# Altium PCB Hub.PcbDoc
Units mil, origin at the board's own origin, x right, y up, seen from the top; angles counter-clockwise.
Board outline 2440.94 x 2440.94 mil, 4 copper layers (Top Layer, Layer 2, Layer 3, Bottom Layer), stack 63.977 mil thick; 78 components, 68 nets, 305 pads, 111 vias.
Unrouted connection lines stored in the file: 111.
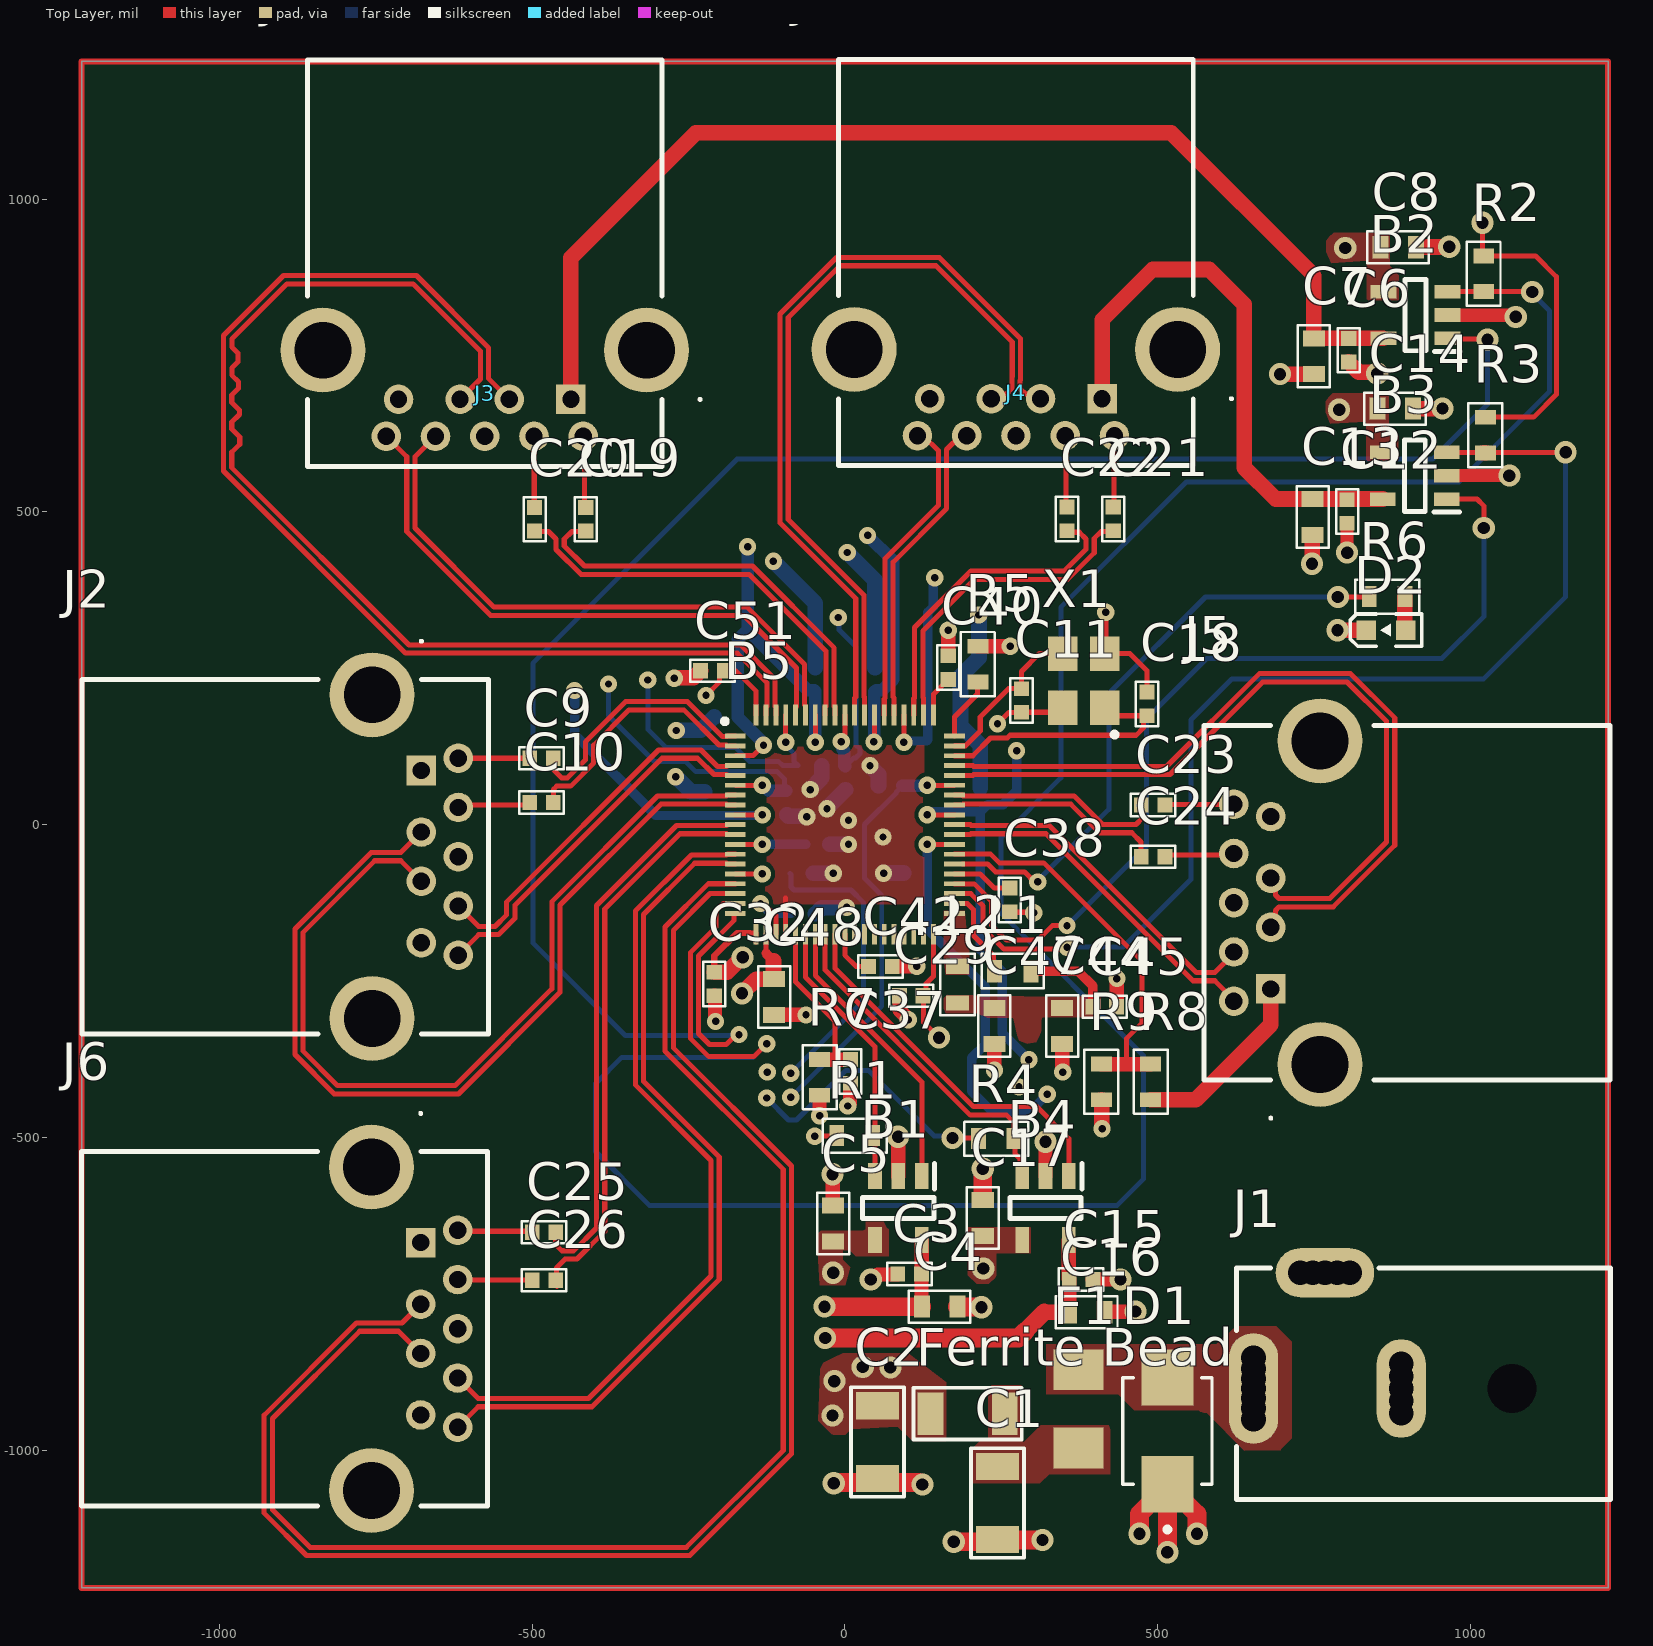
[diagram p0: Top Layer view]
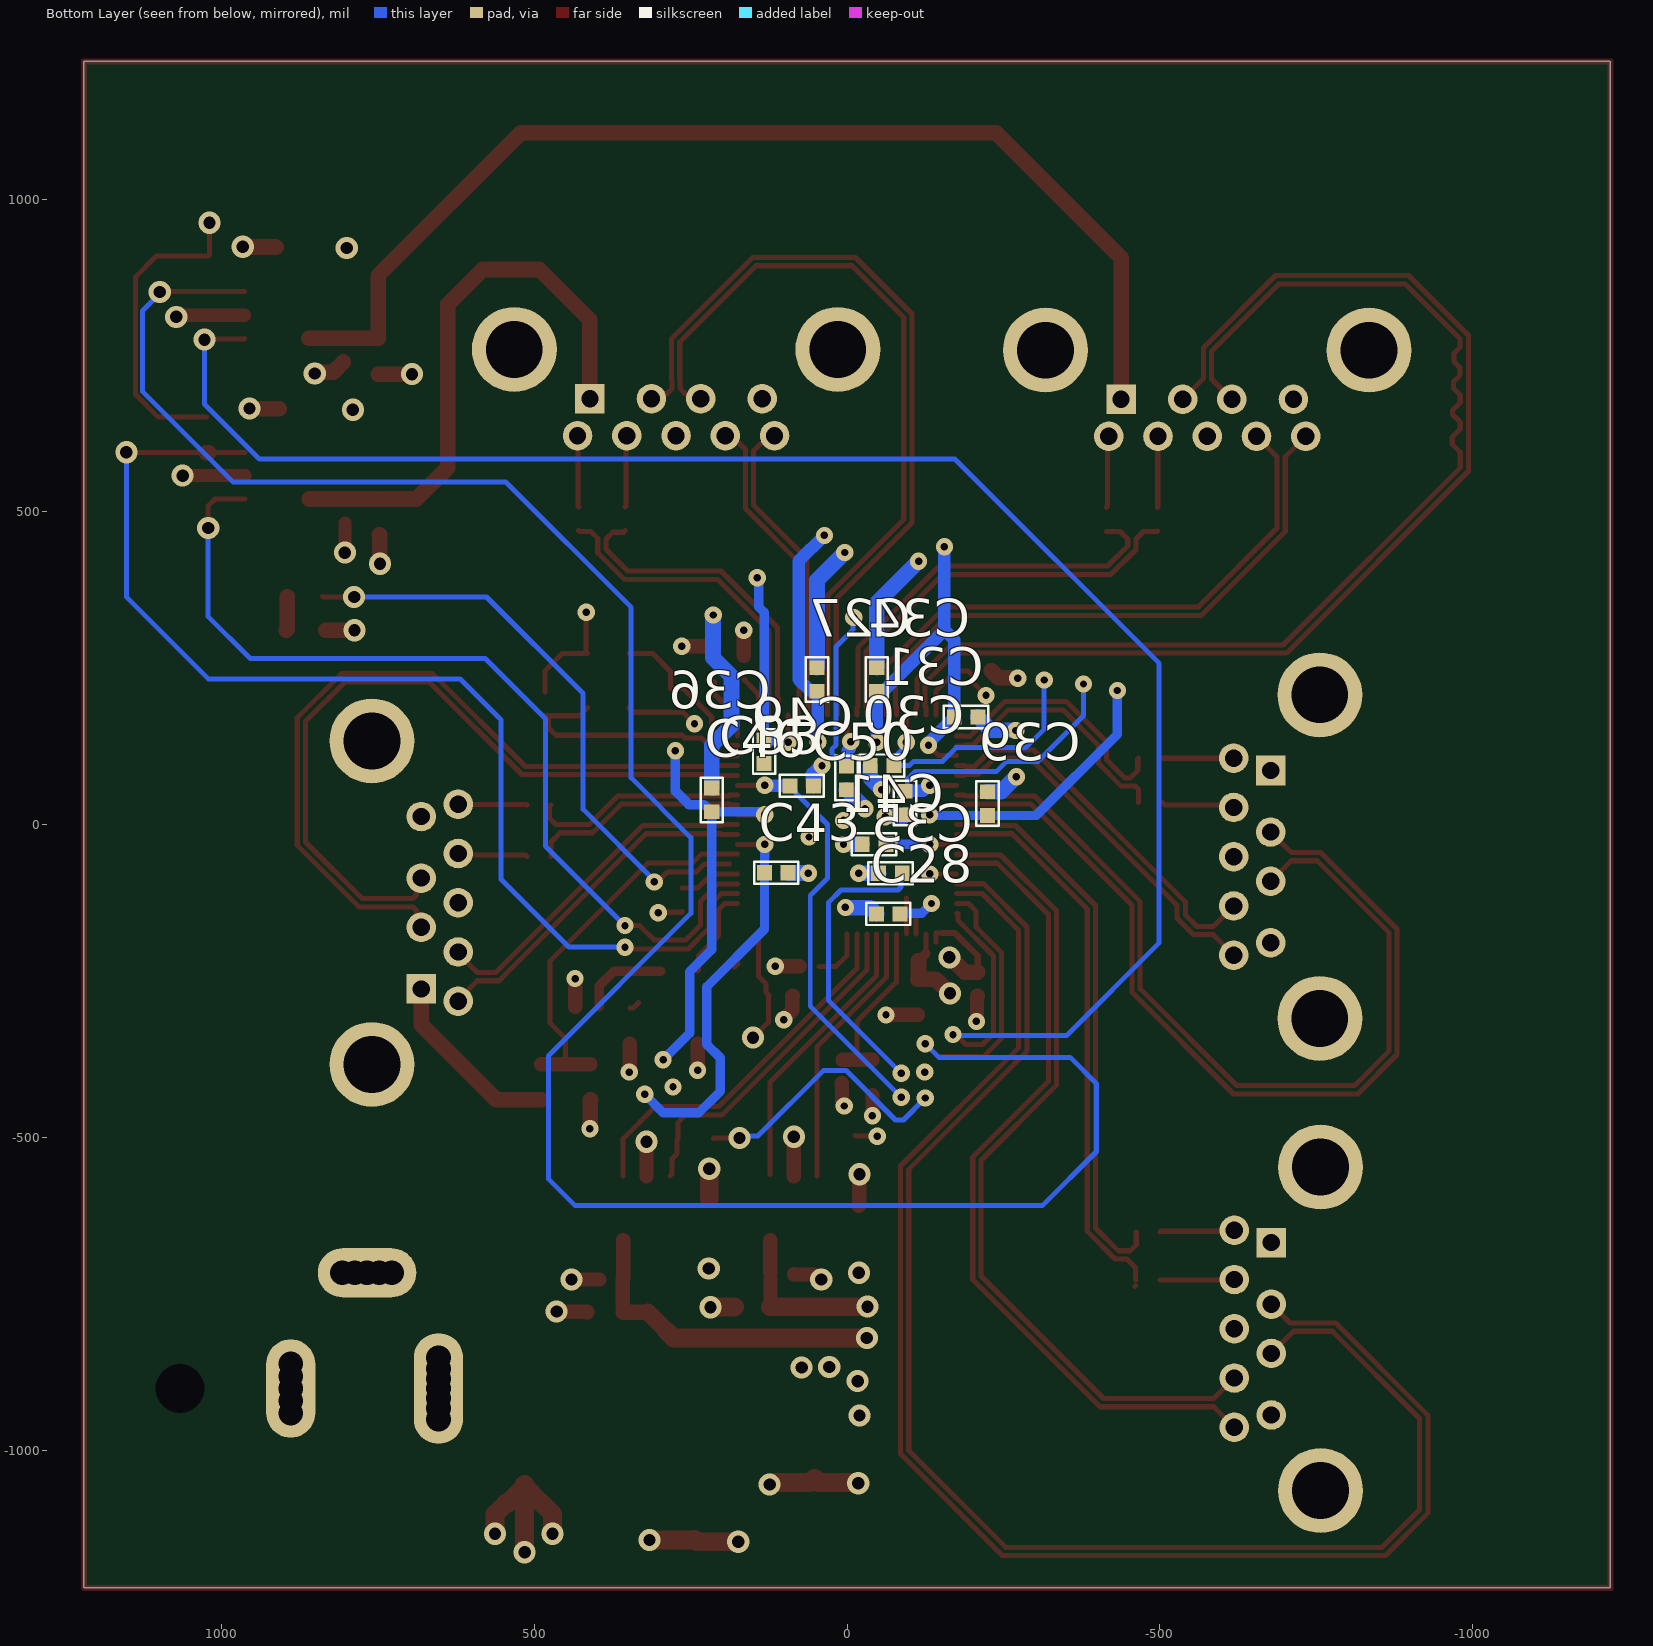
[diagram p1: Bottom Layer view, seen from below]
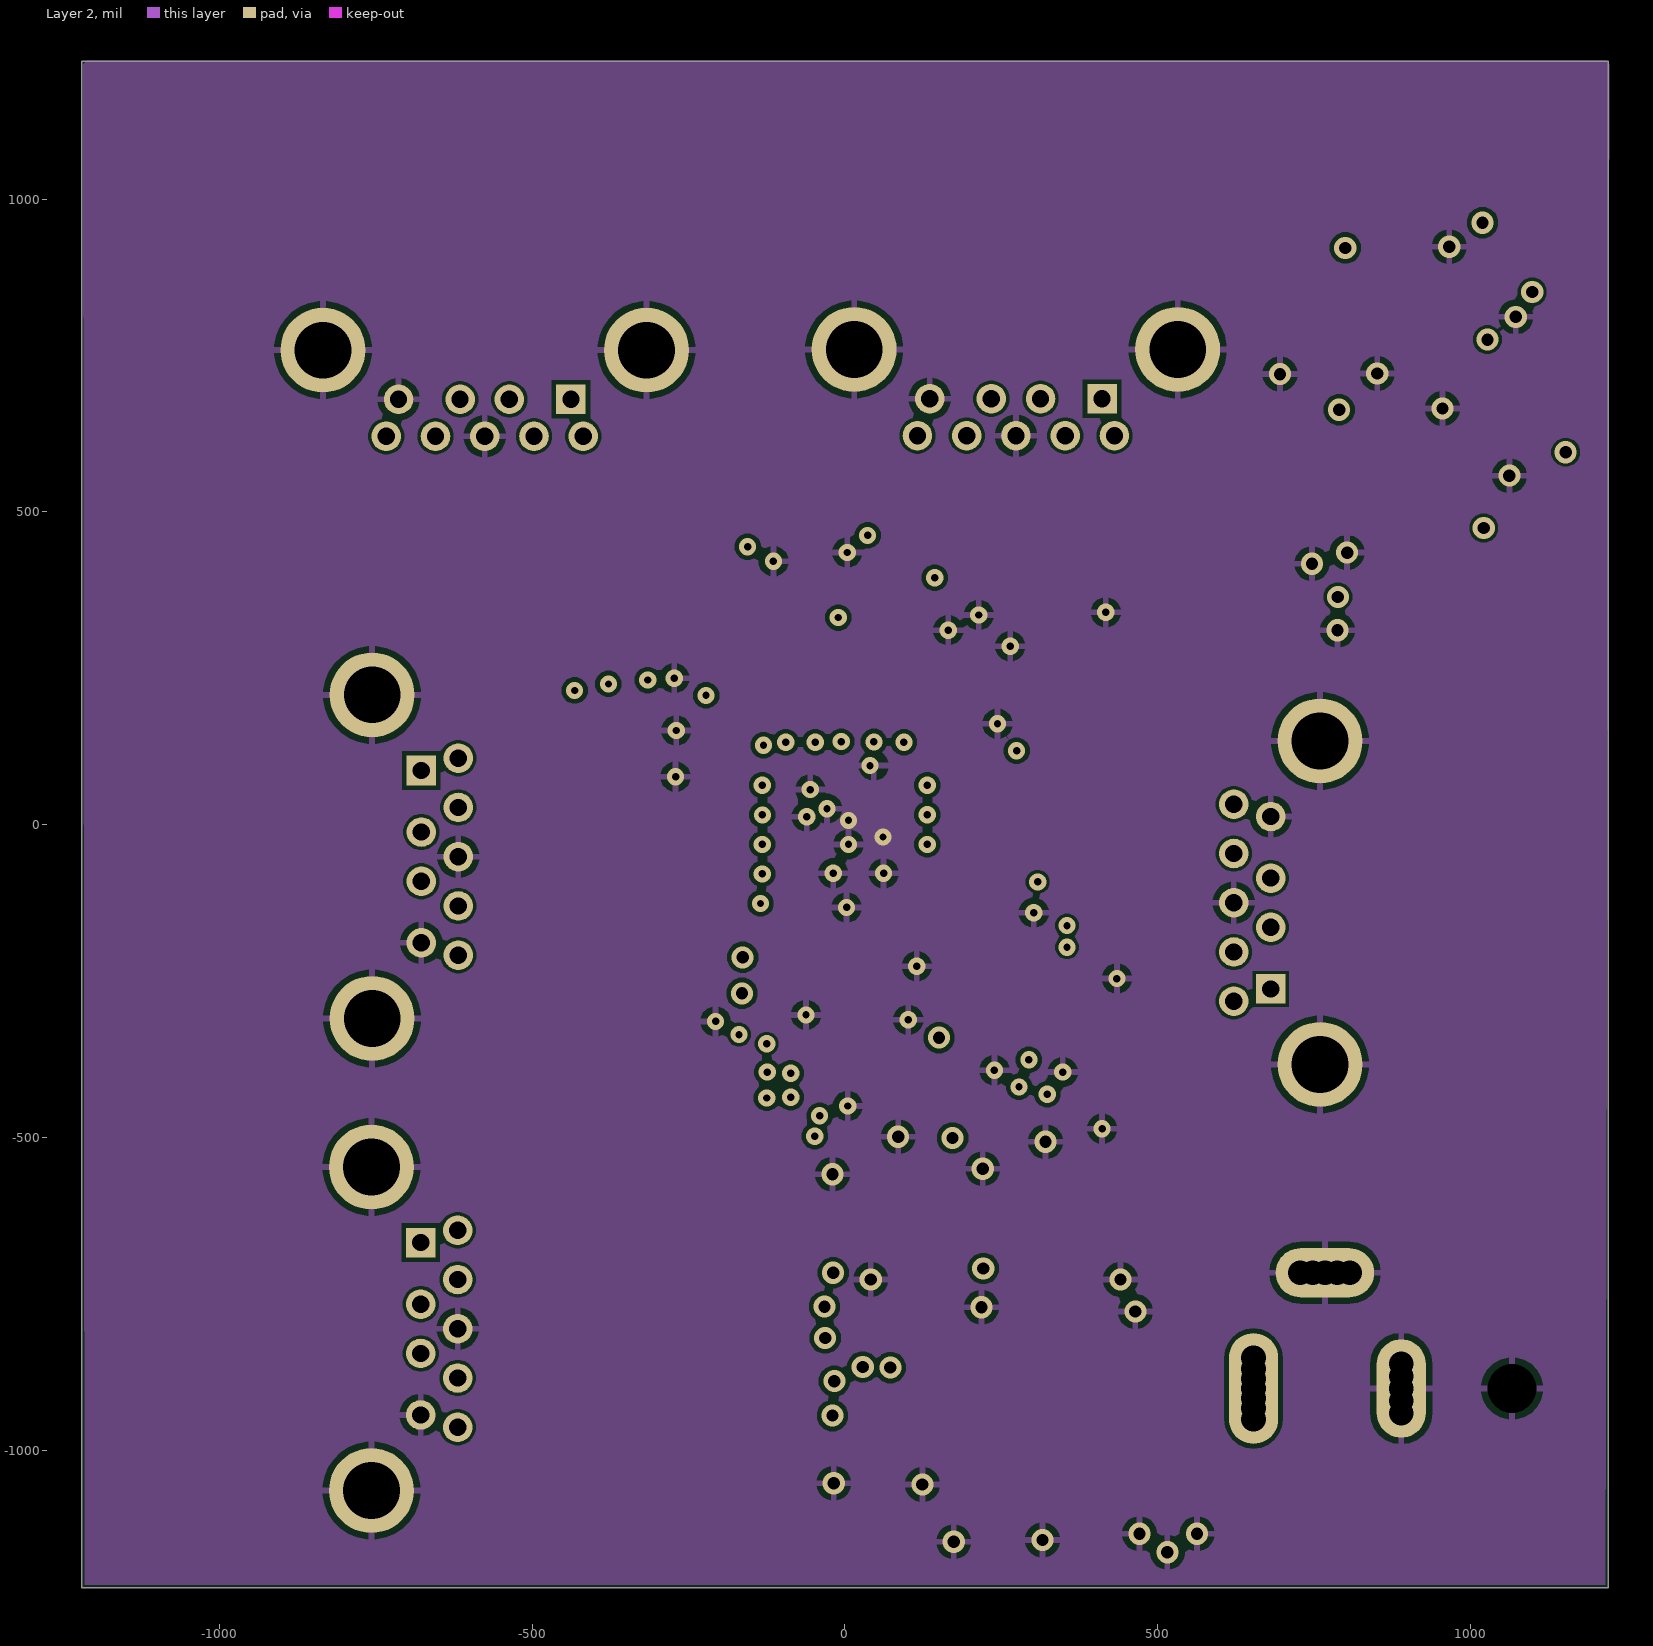
[diagram p2: Layer 2]
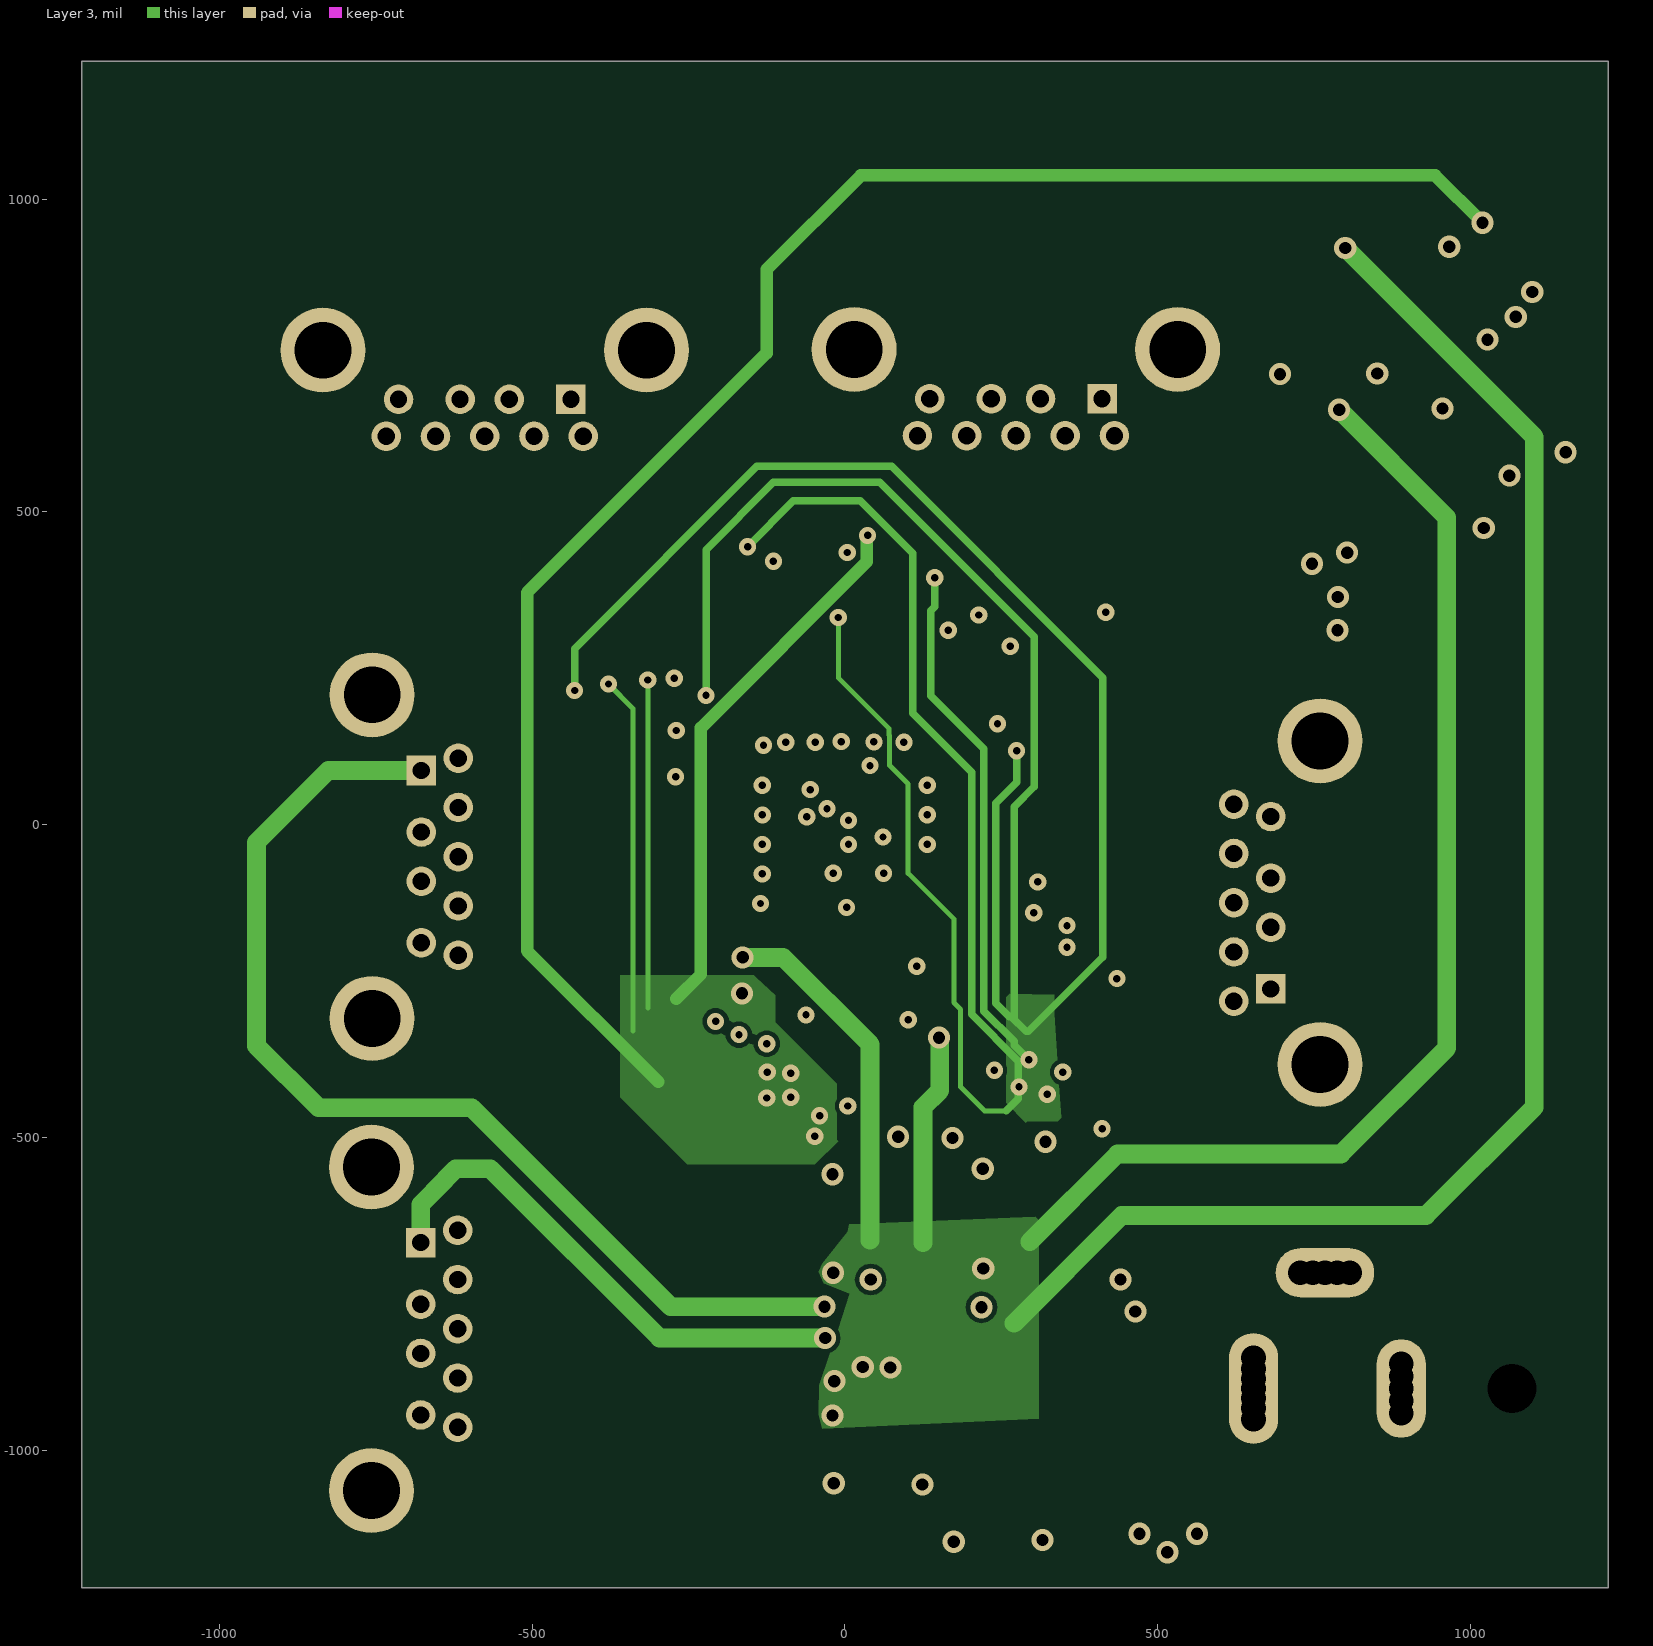
[diagram p3: Layer 3]
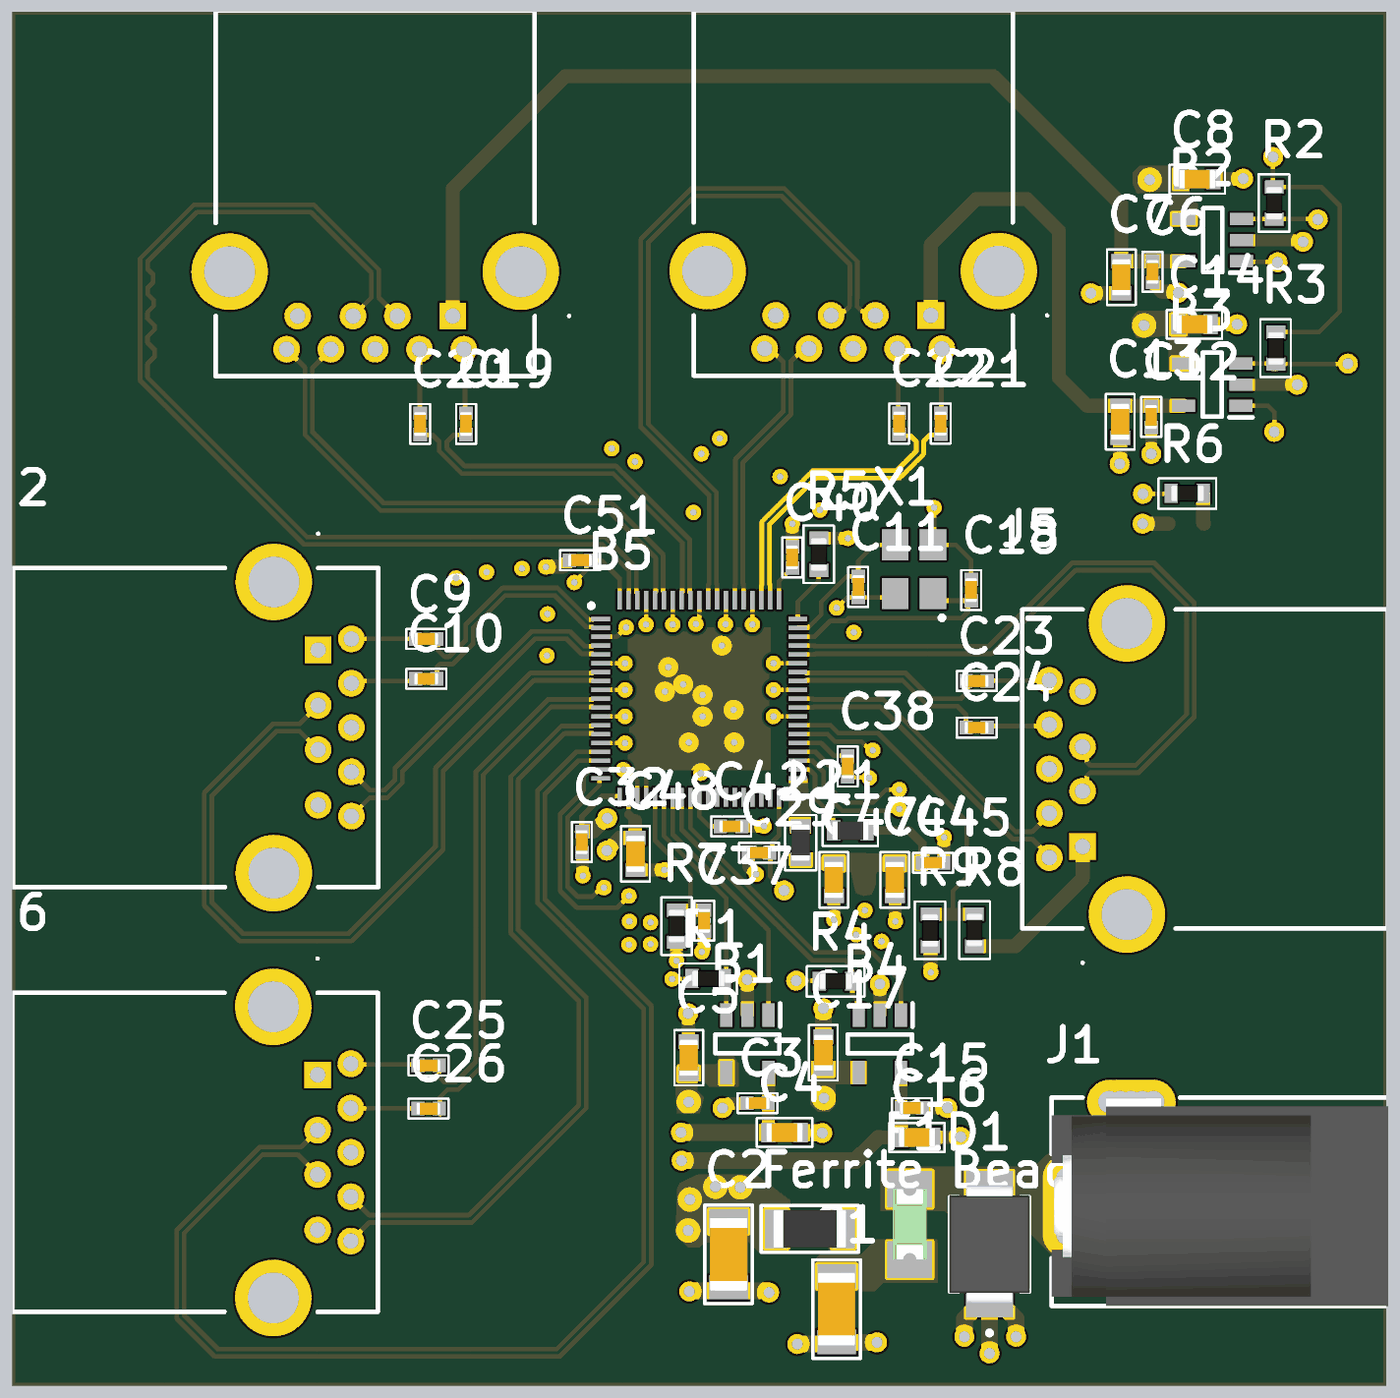
[diagram p4: 3D render of the assembled board from above, using the file's embedded part models]
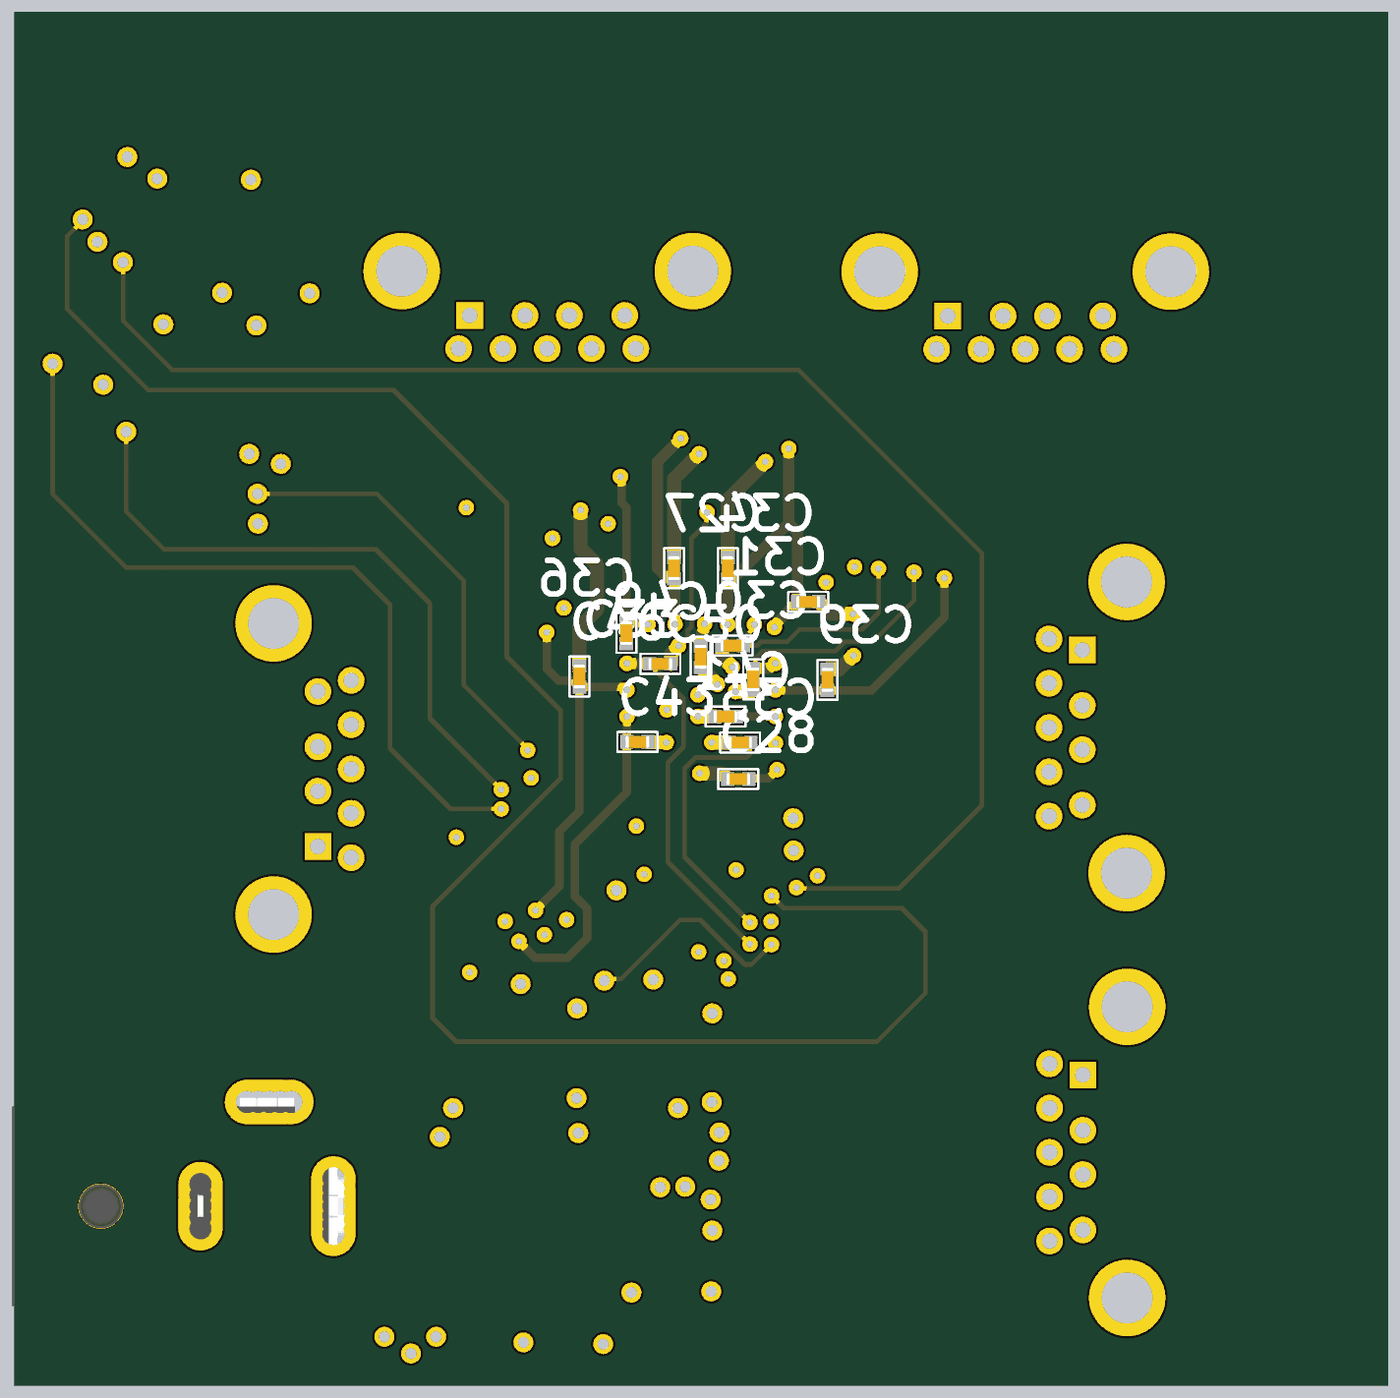
[diagram p5: 3D render of the assembled board from below, using the file's embedded part models]

## Layer stack, top to bottom
Top Solder: solder mask 1, SM-001, Dk 4
Top Layer: signal copper 1.378
Dielectric 1: prepreg 8.268, PP-017, Dk 4.3
Layer 2: signal copper 0.689
Dielectric 2: core 43.307, Core-039, Dk 4.8
Layer 3: signal copper 0.689
Dielectric 3: prepreg 8.268, PP-017, Dk 4.3
Bottom Layer: signal copper 1.378
Bottom Solder: solder mask 1, SM-001, Dk 4

## Board outline
-1220.47,-1220.47 -1220.47,1220.47 1220.47,1220.47 1220.47,-1220.47

## Design rules (kind name [scope] priority, off if disabled: settings)
Clearance Power [InNetClass('Power Class')] p1: gap=7 ignorepadtopadclearanceinfootprint=FALSE
Clearance [All] p2: gap=5 ignorepadtopadclearanceinfootprint=FALSE
DiffPairsRouting [All] p1: maxlimit=5 minlimit=5 mostfreqgap=5 toplayer_minwidth=8.17 toplayer_maxwidth=8.17 toplayer_prefwidth=8.17 midlayer1_minwidth=5.78 midlayer1_maxwidth=5.78 midlayer1_prefwidth=5.78 midlayer2_minwidth=5.78 midlayer2_maxwidth=5.78 midlayer2_prefwidth=5.78 bottomlayer_minwidth=8.17 bottomlayer_maxwidth=8.17 bottomlayer_prefwidth=8.17 impedanceprofiledriven=TRUE impedanceprofileid={EBA9EF47-03B7-44E5-A8EC-CA89CEC4901F} impedanceprofilevalue=90.000000 maxuncoupledlength=500
MatchedLengths [InDifferentialPairClass('All Differential Pairs')] p1: tolerance=2 checknetsindiffpair=FALSE checkdiffpairvsdiffpair=TRUE checkxsignals=TRUE checkothers=TRUE
PolygonConnect "GND Under IC" [All vs IsNamedPolygon('GND_L01_P000')] p1: thpad.connectstyle=Direct thpad.reliefconductorwidth=10 thpad.reliefentries=4 thpad.polygonreliefangle="90 Angle" thpad.airgapwidth=10 smdpad.connectstyle=Relief smdpad.reliefconductorwidth=10 smdpad.reliefentries=4 smdpad.polygonreliefangle="90 Angle" smdpad.airgapwidth=10 via.connectstyle=Direct via.reliefconductorwidth=10 via.reliefentries=4 via.polygonreliefangle="90 Angle" via.airgapwidth=10
PolygonConnect "Power Class" [InNetClass('Power Class')] p2: connectstyle=Direct reliefconductorwidth=10 reliefentries=4 polygonreliefangle="90 Angle" airgapwidth=10
PolygonConnect [All] p3: connectstyle=Relief reliefconductorwidth=10 reliefentries=4 polygonreliefangle="90 Angle" airgapwidth=10
RoutingVias [All] p1: holewidth=28 width=50 viastyle="Through Hole" minholewidth=7.87 minwidth=17.72 maxholewidth=28 maxwidth=50
SolderMaskExpansion [All] p1: expansion=4 istentingtop=FALSE
SupplyNets "Schematic Supply Nets_1" [InNet('+5 NF')] p1: voltage=0.000
SupplyNets "Schematic Supply Nets_11" [InNet('USB2')] p2: voltage=0.000
SupplyNets "Schematic Supply Nets_10" [InNet('USB3')] p3: voltage=0.000
SupplyNets "Schematic Supply Nets_9" [InNet('+5 Bus')] p4: voltage=0.000
SupplyNets "Schematic Supply Nets_8" [InNet('GND')] p5: voltage=0.000
SupplyNets "Schematic Supply Nets_7" [InNet('+5')] p6: voltage=0.000
SupplyNets "Schematic Supply Nets_5" [InNet('USB4')] p7: voltage=0.000
SupplyNets "Schematic Supply Nets_4" [InNet('USB Bus')] p8: voltage=0.000
SupplyNets "Schematic Supply Nets_3" [InNet('+3v3')] p9: voltage=0.000
SupplyNets "Schematic Supply Nets_2" [InNet('USB1')] p10: voltage=0.000
SupplyNets "Schematic Supply Nets" [InNet('+1v1 Fil')] p11: voltage=0.000
Width [All] p1: maxlimit=39.37 minlimit=7.87 preferedwidth=11.81
29 further rules are at their usual default settings.

## Classes and differential pairs
net class "Super Speed": SSRXI_N SSRXI_P SSRXO1_N SSRXO1_P SSRXO2_N SSRXO2_P SSRXO3_N SSRXO3_P SSRXO4_N SSRXO4_P SSTXI_N SSTXI_P SSTXO1_N SSTXO1_P SSTXO2_N SSTXO2_P SSTXO3_N SSTXO3_P SSTXO4_N SSTXO4_P
net class "Power Class": "1v1 Out" 1v1FB "+1v1 Fil" +3v3 +5 "+5 Bus" "+5 NF" USB1 USB2 USB3 USB4
differential pair SSTXO4: +SSTXO4_P -SSTXO4_N
differential pair SSTXO3: +SSTXO3_P -SSTXO3_N
differential pair SSTXO2: +SSTXO2_P -SSTXO2_N
differential pair SSTXO1: +SSTXO1_P -SSTXO1_N
differential pair SSTXI: +SSTXI_P -SSTXI_N
differential pair SSRXO4: +SSRXO4_P -SSRXO4_N
differential pair SSRXO3: +SSRXO3_P -SSRXO3_N
differential pair SSRXO2: +SSRXO2_P -SSRXO2_N
differential pair SSRXO1: +SSRXO1_P -SSRXO1_N
differential pair SSRXI: +SSRXI_P -SSRXI_N
differential pair DO4: +DO4_P -DO4_N
differential pair DO3: +DO3_P -DO3_N
differential pair DO2: +DO2_P -DO2_N
differential pair DO1: +DO1_P -DO1_N
differential pair DI: +DI_P -DI_N

## Components (designator, comment, footprint, x,y, rotation, side; value= is the part's Value field where it differs from the comment)
B1 "AP22818BKAWT-7" SOT95P280X100-5N 85.63,-613.19 r270 top
B2 "AP22818BKAWT-7" SOT95P280X100-5N 912.4,814.96 r180 top
B3 "AP22818BKAWT-7" SOT95P280X100-5N 911.42,558.07 r180 top
B4 "AP22818BKAWT-7" SOT95P280X100-5N 320.87,-613.19 r270 top
B5 "VL817-Q7_B0_" QFN40P900X900X90-77N-D 0,0 r0 top locked
C1 "10uF" CAP1206 332.28,-1253.78 r90 top
C2 "10uF" CAP1206 140.35,-1156.34 r90 top
C3 "100nF" CAP0402#1 -22.8,-824.57 r0 top
C4 "10u" CAP0603 275.28,-708.94 r180 top
C5 "1u" CAP0603 -80.43,-514.09 r270 top
C6 "100nF" CAP0402#1 911.67,632.32 r90 top
C7 "10u" CAP0603 811.73,625.31 r90 top
C8 "1u" CAP0603 1008.54,984.96 r180 top
C9 "100nF" CAP0402#1 -358.7,212.36 r180 top
C10 "100nF" CAP0402#1 -358.7,141.5 r180 top
C11 "33p" CAP0402#1 176.42,324.96 r270 top
C12 "100nF" CAP0402#1 909.21,374.45 r90 top
C13 "10u" CAP0603 809.76,368.43 r90 top
C14 "1u" CAP0603 1003.62,727.09 r180 top
C15 "100nF" CAP0402#1 504.09,-621.3 r180 top
C16 "10u" CAP0603 510.51,-717.8 r180 top
C17 "1u" CAP0603 158.74,-505.24 r270 top
C18 "33p" CAP0402#1 377.2,319.45 r270 top
C19 "100nF" CAP0402#1 -308.31,362.05 r90 top
C20 "100nF" CAP0402#1 -390,362.05 r90 top
C21 "100nF" CAP0402#1 535.24,362.64 r90 top
C22 "100nF" CAP0402#1 461.38,362.64 r90 top
C23 "100nF" CAP0402#1 366.57,-74.57 r0 top
C24 "100nF" CAP0402#1 366.57,-157.24 r0 top
C25 "100nF" CAP0402#1 -354.76,-545.51 r180 top
C26 "100nF" CAP0402#1 -354.76,-622.28 r180 top
C27 "100nF" CAP0402#2 -57.83,358.43 r270 bottom
C28 "100nF" CAP0402#1 60.59,-248.78 r180 bottom
C29 "100nF" CAP0402#1 -20.24,-379.69 r0 top
C30 "100nF" CAP0402#2 70.43,200.55 r180 bottom
C31 "100nF" CAP0402#2 -316.5,66.18 r0 bottom
C32 "100nF" CAP0402#1 -102.6,-381.06 r90 top
C33 "100nF" CAP0402#1 -53.7,168.07 r0 bottom
C34 "100nF" CAP0402#2 -153.31,358.43 r270 bottom
C35 "100nF" CAP0402#2 57.24,28.31 r180 bottom
C36 "100nF" CAP0402#2 238.94,-9.41 r90 bottom
C37 "100nF" CAP0402#1 114.96,-520.86 r90 top
C38 "100nF" CAP0402#1 369.84,-246.61 r90 top
C39 "100nF" CAP0402#2 -330.47,160 r270 bottom
C40 "100nF" CAP0402#1 59.29,377.52 r270 top
C41 "100nF" CAP0402#2 83.23,74.57 r180 bottom
C42 "100nF" CAP0402#1 183.19,-120.63 r180 top
C43 "100nF" CAP0402#1 -12.95,29.29 r0 bottom
C44 "10u" CAP0603 409.17,-445.55 r90 top
C45 "100nF" CAP0402#1 541.89,-185.28 r180 top
C46 "100nF" CAP0402#1 322.6,165.91 r270 bottom
C47 "10u" CAP0603 300.91,-445.55 r90 top
C48 "4u7" CAP0603 -51.46,-399.29 r90 top
C49 "100nF" CAP0402#2 107.05,-51.73 r90 bottom
C50 "100nF" CAP0402#1 -198.58,-91.69 r90 bottom
C51 "100nF" CAP0402#1 -338.15,140 r0 top
D1 "SMBJ5V0A" DIOM4336X265N 515.75,-969.49 r90 top
D2 "LED0603" LED_SMD_0603 -776.3,-1478.94 r0 top
F1 "1206L300SLTHYR" FUSC3115X66N 374.02,-934.06 r270 top
"Ferrite Bead" "HCB3216KF-601T30" IND1206 454.96,-795.59 r180 top
J1 "Power Jack" "Power Jack" 1224.41,-901.57 r180 top
J2 "GSB4111312HR" GSB4111312HR -677.17,86.61 r0 top
J3 "GSB4111312HR" GSB4111312HR -437.99,680.12 r270 top
J4 "GSB4111312HR" GSB4111312HR 411.42,681.1 r270 top
J5 "GSB4111312HR" GSB4111312HR 681.1,-262.6 r180 top
J6 "GSB4111312HR" GSB4111312HR -678.15,-668.31 r0 top
L1 "2u2" IND0603 267.6,-113.74 r180 top
L2 "4u7" IND0603 300.63,-254.8 r90 top
R1 "100K" RES0603 185.08,-440.87 r180 top
R2 "100K" RES0603 1077.83,711.57 r90 top
R3 "100K" RES0603 1080.79,453.7 r90 top
R4 "100K" RES0603 411.46,-445.79 r180 top
R5 "6k04 1%" RES0603 268.78,87.56 r90 top
R6 "330" RES0603 1036.5,421.3 r180 top
R7 "330" RES0603 -96.71,-234.82 r270 top
R8 "100K" RES0603 432.8,-241.93 r270 top
R9 "100K" RES0603 466.61,-580.75 r90 top
X1 "YSX321SL" YSX321SL 381.89,230.32 r90 top

## Footprints (in the part's own frame and the unit in brackets; to place one, negate y for a bottom-side part, rotate by r counter-clockwise, add the part's x,y. Pads: shape width x height; smd on the part's side, far side on the other; paste and mask are expansions set on the pad)
CAP0402#1 [mm]
  rect 0.6x0.62 smd mask+0.06: 1(2.729,2.694) 2(3.689,2.694)
  silkscreen extent 2.31,2.24 4.11,3.14, body extent 2.66,2.42 3.76,2.97, height 0.32
CAP0402#2 [mm]
  rect 0.6x0.62 smd mask+0.06: 1(2.729,-2.694) 2(3.689,-2.694)
  silkscreen extent 2.31,-3.14 4.11,-2.24, body extent 2.66,-2.97 3.76,-2.42, height 0.32
CAP0603 [mm]
  rect 0.65x0.9 smd: 1(2.417,1.568) 2(3.867,1.568)
  silkscreen extent 1.89,0.92 4.39,2.22, body extent 2.32,1.14 3.97,1.99, height 0.4
CAP1206 [mm]
  rect 1.1x1.75 smd: 1(2.821,2.24) 2(5.771,2.24)
  silkscreen extent 2.07,1.17 6.52,3.31, body extent 2.65,1.39 5.95,3.09, height 0.94
DIOM4336X265N [mm]
  rect 2.28x2.12 smd: A(2.165,0) C(-2.165,0)
  silkscreen extent -4.1,-1.81 2.16,1.81, body extent -2.67,-1.81 2.67,1.81, height 2.65
FUSC3115X66N [mm]
  rect 1.65x2.03 smd: 1(-1.59,0) 2(1.59,0)
  body extent -1.59,-0.76 1.59,0.76, height 0.66
GSB4111312HR [mm]
  rect 1.2x1.2 hole 0.7: 1(0,0)
  round 1.2 hole 0.7: 2(0,-2.5) 3(0,-4.5) 4(0,-7) 5(1.5,-7.5) 6(1.5,-5.5) 7(1.5,-3.5) 8(1.5,-1.5) 9(1.5,0.5)
  round 3.45 hole 2.3: 10(-2,3.07) 11(-2,-10.07)
  silkscreen extent -13.78,-10.7 2.72,5.3
IND0603 [mm]
  rect 0.62x0.92 smd: 1(-0.768,3.061) 2(0.722,3.061)
  silkscreen extent -1.27,2.36 1.23,3.76, body extent -0.85,2.64 0.8,3.49, height 0.4
IND1206 [mm]
  rect 1.04x1.74 smd: 1(5.056,3.717) 2(8.076,3.717)
  silkscreen extent 4.37,2.67 8.77,4.77, body extent 4.92,2.87 8.22,4.57, height 0.94
LED_SMD_0603 [mm]
  rect 0.8x0.8 smd: 1(40.894,45.466) 2(42.494,45.466)
  silkscreen extent 40.24,44.81 43.15,46.12, body extent 40.89,45.07 42.49,45.87, height 0.7
"Power Jack" [mm] "Power Adaptor Jack"
  round 1.5 hole 1: 1(14.5,-1.25) 1(14.5,-0.8) 1(14.5,-0.4) 1(14.5,0.4) 1(14.5,0.8) 1(14.5,1.25) 2(8.5,-1) 2(8.5,1) 2(8.5,-0.5) 2(8.5,0.5) 3(10.6,-4.7) 3(11.1,-4.7) 3(12.1,-4.7) 3(12.6,-4.7)
  oval 2x4.5 hole 1: 1(14.5,0)
  oval 2x4 hole 1: 2(8.5,0)
  oval 4x2 hole 1: 3(11.6,-4.7)
  round 1.9 hole 2: MH(4,0)
  silkscreen extent 0,-4.9 15.2,4.5, body extent 0,-4.9 15.2,4.5, height 11
QFN40P900X900X90-77N-D [mm]
  rect 0.85x0.2 smd: 1(-4.45,3.6) 2(-4.45,3.2) 3(-4.45,2.8) 4(-4.45,2.4) 5(-4.45,2) 6(-4.45,1.6) 7(-4.45,1.2) 8(-4.45,0.8) 9(-4.45,0.4) 10(-4.45,0) 11(-4.45,-0.4) 12(-4.45,-0.8) 13(-4.45,-1.2) 14(-4.45,-1.6) 15(-4.45,-2) 16(-4.45,-2.4) 17(-4.45,-2.8) 18(-4.45,-3.2) 19(-4.45,-3.6) 39(4.45,-3.6) 40(4.45,-3.2) 41(4.45,-2.8) 42(4.45,-2.4) 43(4.45,-2) 44(4.45,-1.6) 45(4.45,-1.2) 46(4.45,-0.8) 47(4.45,-0.4) 48(4.45,0) 49(4.45,0.4) 50(4.45,0.8) 51(4.45,1.2) 52(4.45,1.6) 53(4.45,2) 54(4.45,2.4) 55(4.45,2.8) 56(4.45,3.2) 57(4.45,3.6)
  rect 0.2x0.85 smd: 20(-3.6,-4.45) 21(-3.2,-4.45) 22(-2.8,-4.45) 23(-2.4,-4.45) 24(-2,-4.45) 25(-1.6,-4.45) 26(-1.2,-4.45) 27(-0.8,-4.45) 28(-0.4,-4.45) 29(0,-4.45) 30(0.4,-4.45) 31(0.8,-4.45) 32(1.2,-4.45) 33(1.6,-4.45) 34(2,-4.45) 35(2.4,-4.45) 36(2.8,-4.45) 37(3.2,-4.45) 38(3.6,-4.45) 58(3.6,4.45) 59(3.2,4.45) 60(2.8,4.45) 61(2.4,4.45) 62(2,4.45) 63(1.6,4.45) 64(1.2,4.45) 65(0.8,4.45) 66(0.4,4.45) 67(0,4.45) 68(-0.4,4.45) 69(-0.8,4.45) 70(-1.2,4.45) 71(-1.6,4.45) 72(-2,4.45) 73(-2.4,4.45) 74(-2.8,4.45) 75(-3.2,4.45) 76(-3.6,4.45)
  silkscreen extent -4.97,4.1 -4.77,4.3
RES0603 [mm]
  rect 0.6x0.85 smd: 1(3.576,1.427) 2(5.026,1.427)
  silkscreen extent 3,0.75 5.6,2.13, body extent 3.53,1.05 5.05,1.81, height 0.45
SOT95P280X100-5N [mm]
  rect 1.05x0.55 smd: 1(-1.3,0.95) 2(-1.3,0) 3(-1.3,-0.95) 4(1.3,-0.95) 5(1.3,0.95)
  silkscreen extent -1.83,-1.45 0.43,1.48
YSX321SL [mm]
  rect 1.4x1.2 smd: 1(-1.1,-0.85) 2(1.1,-0.85) 3(1.1,0.85) 4(-1.1,0.85)
  silkscreen extent -2.29,-1.35 -2.09,-1.15

## Part data
B1 B2 B3 B4: "USB Switch ICs USB Power Switch TSOT25 T&R 3K", Manufacturer_Name="Diodes Incorporated", Mouser Part Number=621-AP22818BKAWT-7, Arrow Part Number=AP22818BKAWT-7, Arrow Price/Stock=https://www.arrow.com/en/products/ap22818bkawt-7/diodes-incorporated?utm_currency=USD&region=nac, Datasheet Link=https://www.diodes.com/assets/Datasheets/AP22816_17_18.pdf, Geometry.Height=1mm, Manufacturer_Part_Number=AP22818BKAWT-7, Mouser Price/Stock=https://www.mouser.co.uk/ProductDetail/Diodes-Incorporated/AP22818BKAWT-7?qs=7D1LtPJG0i00w4y0p06PMw%3D%3D
B5: "QFN-76_9x9x04P USB ICs RoHS", Manufacturer_Name=VIA, Manufacturer_Part_Number=VL817-Q7(B0), Datasheet Link=https://item.szlcsc.com/210703.html, Geometry.Height=0.9mm
C1 C2: library part CAP1206, "CAP1206"
C3 C6 C9 C10 C11 C12 C15 C18 C19 C20 C21 C22 C23 C24 C25 C26 C27 C28 C29 C30 C31 C32 C33 C34 C35 C36 C37 C38 C39 C40 C41 C42 C43 C45 C46 C49 C50 C51: library part CAP0402, "CAP0402"
C4 C5 C7 C8 C13 C14 C16 C17 C44 C47 C48: library part CAP0603, "CAP0603"
D1: "DIODE, TVS, 5V, 600W, SMB; TVS Polarity:Unidirectional; Reverse Stand-Off Voltage Vrwm:5V; Breakdown Voltage Range:6.4V to 7V; Clamping Voltage Vc Max:9.2V; Peak Pulse Current Ippm:65.2A; Diode Case Style:SMB; No. of Pins:2; SVHC:No SVHC (19-Dec-2011); Al", Package="SMB-2 Fairchild Semiconductor", Check_prices=https://www.snapeda.com/parts/SMBJ5V0A/Fairchild+Imaging/view-part/?ref=eda, MF="Fairchild Semiconductor", MP=SMBJ5V0A, SnapEDA_Link=https://www.snapeda.com/parts/SMBJ5V0A/Fairchild+Imaging/view-part/?ref=snap
D2: library part LED_SMD_0603
F1: library part 046602.5NRHF, "475 Series 1206 Fast-Acting Fuse", Package=None, Check_prices=https://www.snapeda.com/parts/046602.5NRHF/Littelfuse/view-part/?ref=eda, MF=Littelfuse, MP=046602.5NRHF, SnapEDA_Link=https://www.snapeda.com/parts/046602.5NRHF/Littelfuse/view-part/?ref=snap
"Ferrite Bead": library part IND1206, "IND1206"
J2 J3 J4 J5 J6: "USB 3.2 GEN 2, Type A, Receptacle, Right Angle, 9 Pins, Shell with Nickel Plating, 30uin Gold, Dip 2.4mm, Blue High Temperature Housing, Tray Packaging", Manufacturer_Name="Amphenol Communications Solutions", Datasheet Link=https://cdn.amphenol-cs.com/media/wysiwyg/files/drawing/gsb4111xxxhr.pdf, Geometry.Height=7.94mm, Manufacturer_Part_Number=GSB4111312HR
L1 L2: library part IND0603, "IND0603"
R1 R2 R3 R4 R5 R6 R7 R8 R9: library part RES0603, "RES0603"
X1: "Crystal", Manufacturer_Name=YXC, Datasheet Link=https://datasheet.lcsc.com/szlcsc/YSX321SL-30MHZ-10PF-8PPM_C70576.pdf, Geometry.Height=0.8mm, Manufacturer_Part_Number=YSX321SL
J1: Adding Date=10/21/2009, Company=Personal, Designer="Saeid Jorablo", Project Name=Laser

## Via types
v1: diameter 27.56, hole 11.81, Top Layer to Bottom Layer, 67 vias
v2: diameter 35.43, hole 19.68, Top Layer to Bottom Layer, 44 vias

## Nets (pads, with @x,y where several pads share a name; then routed paths per layer and width w, separated by ;. In a path a pad name is that pad's centre, name@x,y a point inside that pad or via, vN(x,y) a via of type N, cw(c..) or ccw(c..) an arc to the next point about the centre after c; other vN are vias at no path point)
"1v1 Out": B5.39 L2.2 | length 7
  Top Layer w10: L2.2@175.2,-221.46 L2.2
1v1FB: B5.40 L1.2 | length 146.9
  Top Layer w8: B5.40 195.87,-125.98 205.71,-135.83 205.71,-177.17 237.37,-208.83 237.37,-232.45 L1.2
"+1v1 Fil": B5.3 B5.9 B5.12 B5.22 B5.46 B5.49 B5.61 B5.67 B5.70 B5.76 C28.2 C31.2 C34.2 C36.2 C39.2 C41.2 C43.2 C44.2 C45.2 C46.2 C47.2 C49.2 C51.2 L1.1 L2.1 | length 10570.4
  Top Layer w8: v1(-221.92,206.67) -200.72,227.87 -200.72,238.25 C51.2 -192.35,245.5 -173.79,245.5 -141.73,213.45 B5.76 ; B5.12 v1(-131.89,-31.5) ; B5.9 B5.9 v1(-131.83,15.69) ; B5.3@-175.13,110.3 B5.3 -146.69,110.24 v1(-129.96,126.97) ; v1(-134.84,-125.98) -129.55,-125.98 -110.24,-145.3 B5.22 ; v1(-47.24,131.89) B5.70 ; v1(-5.91,132.87) -5.91,138.17 0,144.07 B5.67 ; v1(94.49,131.89) B5.61 ; v1(131.89,-31.5) B5.46 ; v1(131.89,15.75) B5.49 ; C44.2@333.72,-284.51 342.52,-293.31 C44.2
  Top Layer w15: L1.1 373.03,-234.25 396.65,-257.87 C45.2
  Layer 3 w8: v1(-10.33,331.2) -10.33,234.74 70.87,153.54 70.87,143.02 71.3,142.59 71.3,95.02 101.38,64.94 101.38,-77.76 174.21,-150.59 174.21,-284.45 185.04,-295.28 185.04,-419.29 223.43,-457.68 257.87,-457.68
  Layer 3 w12: v1(-432.09,214.57) -432.09,281.5 -140.75,572.83 74.8,572.83 412.4,235.24 412.4,-211.61 293.31,-330.71 289.91,-330.71 266.07,-306.87 262.58,-306.87 241.14,-285.43 241.14,34.45 274.61,67.91 v1(274.61,118.11) ; v1(-221.92,206.67) -221.92,439.5 -114.17,547.24 56.1,547.24 303.15,300.2 303.15,61.02 270.67,28.54 270.67,-308.07 ; v1(-155.51,444.59) -82.39,517.72 24.83,517.72 108.27,434.28 108.27,178.15 202.76,83.66 202.76,-303.15 277.56,-377.95 277.56,-418.31 v1(278.54,-419.29) 277.17,-420.66 277.17,-438.38 257.87,-457.68 ; v1(143.7,394.68) 143.7,348.61 137.07,341.99 137.07,206.43 222.44,121.06 222.44,-298.23 270.67,-346.46 270.67,-352.36 v1(294.29,-375.98)
  Bottom Layer w8: v1(-10.33,331.2) -9.46,330.32 -9.46,311.62 17.72,284.45 17.72,127.18 24.46,120.44 24.46,113.81 17.19,106.54 14.41,106.54 1.38,93.5 C49.2
  Bottom Layer w15: v1(-432.09,214.57) -432.09,144.68 -302.17,14.76 C39.2 v1@-131.83,14.76 ; v1(-134.84,-125.98) -119.09,-141.73 C28.2@-85.63,-141.73 ; v1(-131.89,-31.5) C41.2 ; v1(94.49,131.89) 96.46,133.86 130.91,133.86 C36.2 132.87,339.57 141.3,347.99 141.3,392.28 v1(143.7,394.68) ; v1@131.89,-34.89 v1(131.89,-31.5) C43.2 132.28,-166.92 224.41,-259.05 224.41,-351.38 202.76,-373.03 202.76,-426.18 237.2,-460.63 294.29,-460.63 v1(323.82,-431.1) ; v1(131.89,15.75) 136.81,20.67 C46.2 ; v1(274.61,118.11) 274.61,53.73 253.03,32.15 228.41,32.15 216.93,20.67 C46.2 ; v1@276.84,-421 v1(278.54,-419.29) ; v1(294.29,-375.98) 251.97,-333.66 251.97,-235.24 216.54,-199.8 C46.2
  Bottom Layer w20: v1@-155.51,443.9 -155.51,311.19 ; v1(-129.96,126.97) -132.36,129.37 -132.36,132.96 -171.26,171.85 C31.2 -171.26,295.45 -155.51,311.19 ; v1(-47.24,131.89) C34.2 -49.06,215 -59.32,215 -155.51,311.19 ; v1(-5.91,132.87) -4.46,131.43 -4.46,121.51 -1.22,118.27 -1.22,95.32 0.59,93.5 C49.2
+3v3: B5.6 B5.15 B5.21 B5.29 B5.43 B5.52 B5.58 B5.64 B5.73 C27.2 C30.2 C33.2 C35.2 C38.2 C40.2 C42.2 C48.2 C50.2 R1.2 R2.2 R3.2 R4.2 R7.2 | length 8645.8
  Top Layer w8: B5.15 v1(-131.89,-78.74) ; B5.6 v1(-131.89,62.99) ; B5.21 -125.92,-175.26 -125.92,-205.77 ; v1(-94.49,131.89) B5.73 ; v1(-48.23,-498.03) -13.78,-498.03 R1.2 ; B5.29 0.06,-175.26 0.06,-208.72 18.03,-226.69 C42.2 C42.2@44.84,-226.69 ; v1(46.52,132.32) 47.18,132.98 47.18,175.13 B5.64 ; v1(131.89,62.99) B5.52 ; B5.58 141.73,208.66 157.15,224.08 157.15,224.47 164.96,232.28 C40.2 ; v2(172.24,-500.98) 212.6,-500.98 R4.2 ; B5.43 216.54,-78.74 239.17,-101.38 C38.2 ; v2(1019.69,962.6) 1019.69,911.42 R2.2 1104.57,909.45 1137.8,876.22 1137.8,687.99 1101.38,651.57 R3.2
  Top Layer w15: -125.92,-205.77 -114.04,-217.65
  Top Layer w23: R7.2 -40.44,-432.78 -40.44,-465.46 v1(-40.35,-465.55)
  Top Layer w25: v2(-164.37,-269.69) -141.73,-247.05 C48.2 ; C48.2@-114.04,-246.19 -114.04,-217.65
  Layer 3 w8: v1(-377.95,224.97) -338.58,185.6 -338.58,-329.72 ; -314.96,-293.31 v1(-314.96,231.3)
  Layer 3 w20: -298.23,-411.42 -507.87,-201.77 -507.87,371.06 -125,753.94 -125,887.8 25.59,1038.39 943.9,1038.39 v2(1019.69,962.6) ; -269.69,-278.54 -230.32,-239.17 -230.32,154.75 34.97,420.04 34.97,461.15 v1(36.42,462.6)
  Bottom Layer w7.87: v1(-86.61,-436.02) 59.06,-290.35 59.06,-113.19 31.5,-85.63 31.5,0.28 82.55,51.34 82.55,52.63 91.54,61.61 C33.2
  Bottom Layer w8: v1(-377.95,224.97) -377.95,174.21 -305.12,101.38 -254.92,101.38 -238.19,84.65 -108.27,84.65 -96.29,72.67 -96.29,57.31 -93.45,54.48 C50.2 ; v1(-314.96,231.3) -314.96,152.56 -285.43,123.03 -174.21,123.03 -152.56,101.38 -106.3,101.38 -99.41,94.49 C30.2 -81.08,100.77 -81.08,113.19 -94.49,126.6 v1(-94.49,131.89) ; v1(-125,-437.01) -89.93,-472.08 -77.39,-472.08 1.97,-392.72 37.63,-392.72 142.53,-497.62 168.88,-497.62 v2(172.24,-500.98) ; C35.2 -86.03,-79.72 -86.03,-99.64 -81.35,-104.33 9.84,-104.33 29.7,-124.19 29.7,-281.32 v1(-86.61,-397.64)
  Bottom Layer w20: v1(-131.89,62.99) -129.84,62.99 -121.33,54.48 C50.2@-93.45,54.48 ; v1(36.42,462.6) 77.73,421.29 77.73,232.43 60.3,215 C27.2@50.04,215 ; v1(46.52,132.32) 47.37,133.18 47.37,212.33 C27.2 ; C33.2 92.03,62.5 131.4,62.5 v1(131.89,62.99)
  other v1: -124.02,-395.67
+5: "Ferrite Bead.2" B1.4 B2.4 B3.4 B4.4 B5.20 B5.38 C2.2 C5.2 C8.2 C14.2 C17.2 C29.2 C32.2 | length 5636.6
  Top Layer w8: v2(-163.39,-212.2) v2@-161.54,-212.2 ; -151.57,-173.23 -141.8,-173.23 -141.73,-173.29 B5.20 B5.20@-141.73,-187.87 ; C29.2@125,-273.23 130.1,-268.13 130.1,-254.1 141.73,-242.47 B5.38 ; C29.2@125.98,-273.62 126.16,-273.8 126.16,-316.12 v2(150.59,-340.55)
  Top Layer w10: C32.2 -208.66,-209.65 -172.24,-173.23 -151.57,-173.23
  Top Layer w25: C32.2 -188.48,-235.83 v2@-164.86,-212.2
  Top Layer w30: v2@-164.86,-212.2 v2(-163.39,-212.2)
  Layer 3 w30: v2(-163.39,-212.2) -98.82,-212.2 40.35,-351.38 40.35,-664.37 ; 125,-668.5 125,-451.77 151.63,-425.14 151.63,-341.59 v2(150.59,-340.55) ; 270.67,-797.24 442.91,-625 929.13,-625 1102.36,-451.77 1102.36,620.08 v2(800.2,922.24) ; 295.76,-666.83 436.02,-526.57 793.31,-526.57 962.6,-357.28 962.6,491.14 v2(790.35,663.39)
  other v2: -19.68,-944.88 -16.73,-889.76 72.83,-868.11 28.54,-867.13 -18.7,-716.54 221.46,-709.65
"+5 Bus": D1.A F1.1 J1.1
"+5 NF": "Ferrite Bead.1" C1.2 F1.2
DI_N: B5.54 J5.2 | length 1263.2
  Top Layer w8.17: B5.54 204.72,94.49 206.01,93.2 514.46,93.2 662.78,241.52 808.61,241.52 879.32,170.81 879.32,-33.02 780.94,-131.39 694.25,-131.39 688.58,-137.06 688.58,-156.7 J5.2
DI_P: B5.53 J5.3 | length 1219.6
  Top Layer w8.17: B5.53 204.72,78.74 206.01,80.03 519.92,80.03 668.24,228.35 803.15,228.35 866.14,165.35 866.14,-27.56 775.48,-118.22 694.25,-118.22 688.58,-112.55 688.58,-92.91 J5.3
DO1_N: B5.8 J2.2 | length 1471.4
  Top Layer w8.17: J2.2 -709.95,-44.59 -757.19,-44.59 -879.32,-166.72 -879.32,-367.66 -816.48,-430.5 -617.95,-430.5 -455.33,-267.87 -455.33,-128.56 -293.99,32.78 -188.98,32.78 -187.69,31.5 B5.8
DO1_P: B5.7 J2.3 | length 1427.8
  Top Layer w8.17: J2.3 -709.95,-57.77 -751.74,-57.77 -866.14,-172.17 -866.14,-362.2 -811.02,-417.32 -623.41,-417.32 -468.5,-262.42 -468.5,-123.1 -299.44,45.96 -188.98,45.96 -187.69,47.24 B5.7
DO2_N: B5.75 J3.2 | length 1885.6
  Top Layer w8.17: J3.2 -569.5,713.2 -569.5,762.42 -685.04,877.95 -897.64,877.95 -993.49,782.1 -993.49,631.25 -993.49,565.41 -702.31,274.23 -171.87,274.23 -124.7,227.06 -124.7,188.98 -125.98,187.69 B5.75
DO2_P: B5.74 J3.3 | length 1879.4
  Top Layer w8.17: J3.3 -582.68,712.6 -582.68,756.96 -690.5,864.78 -892.18,864.78 -980.19,776.77 -980.19,763.65 -970.47,753.94 -970.47,740.16 -980.19,730.44 -980.19,718.79 -969.49,708.08 -969.49,697.83 -980.31,687 -980.31,675.22 -967.95,662.85 -967.95,656.08 -980.32,643.72 -980.32,632.64 -967.52,619.85 -967.52,608.27 -980.31,595.47 -980.31,580.77 -980.32,570.87 -696.85,287.4 -166.41,287.4 -111.52,232.52 -111.52,188.98 -110.24,187.69 B5.74
DO3_N: B5.66 J4.2 | length 1287.6
  Top Layer w8.17: B5.66 15.75,202.15 17.47,203.87 17.47,276.29 17.48,361.53 -103.72,482.73 -103.72,816.48 -13.33,906.87 151.13,906.87 280.89,777.11 280.89,711.08 280.21,710.4 280.21,697.22 288.85,688.58 305.52,688.58 J4.2
DO3_P: B5.65 J4.3 | length 1243.6
  Top Layer w8.17: B5.65 31.5,203.69 30.65,204.54 30.65,270.83 30.65,366.99 -90.55,488.19 -90.55,811.02 -7.87,893.7 145.67,893.7 267.72,771.65 267.72,716.54 267.04,715.85 267.04,697.22 258.39,688.58 241.73,688.58 J4.3
DO4_N: B5.17 J6.2 | length 2458.2
  Top Layer w8.17: J6.2 -708.28,-796.87 -781.12,-796.87 -928.53,-944.28 -928.53,-1100.93 -860.77,-1168.69 -247.43,-1168.69 -247.43,-1168.16 -85.25,-1005.98 -85.25,-545.65 -274.23,-356.68 -274.23,-169.06 -215.41,-110.24 B5.17
DO4_P: B5.16 J6.3 | length 2417.5
  Top Layer w8.17: J6.3 -713.58,-810.04 -775.66,-810.04 -915.35,-949.73 -915.35,-1095.47 -855.31,-1155.51 -253.41,-1155.51 -98.43,-1000.53 -98.43,-551.11 -287.4,-362.13 -287.4,-163.6 -218.29,-94.49 B5.16
EN1: B1.1 B5.26 | length 454.4
  Top Layer w8: B5.26 -47.24,-241.14 123.03,-411.42 B1.1@123.03,-559.06
EN2: B2.1 B5.19 | length 3001.3
  Top Layer w8: B5.19 -176.92,-141.73 -176.98,-141.8 -176.98,-153.05 -234.05,-210.11 -234.05,-333.87 -216.34,-351.57 -189.81,-351.57 -173.86,-335.63 v1(-169.29,-335.63) ; B2.1 964.57,776.57 1026.57,776.57 v2(1027.56,775.59)
  Bottom Layer w8: v1(-169.29,-335.63) -171.01,-337.35 -350.65,-337.35 -499.02,-188.98 -499.02,257.87 -172.24,584.65 939.96,584.65 1027.56,672.24 v2(1027.56,775.59)
EN3: B3.1 B5.42 | length 1480.4
  Top Layer w8: B5.42 206.69,-94.49 234.25,-122.05 234.25,-160.43 258.24,-184.42 308.69,-184.42 331.69,-161.42 v1(355.32,-161.42) ; B3.1 1010.83,520.67 1021.65,509.84 v2(1021.65,474.41)
  Bottom Layer w8: v1(355.32,-161.42) 482.28,-34.45 482.28,169.29 578.74,265.75 954.72,265.75 1021.65,332.68 v2(1021.65,474.41)
EN4: B4.1 B5.28 | length 601.3
  Top Layer w8: B5.28 -15.68,-175.26 -15.68,-229.71 205.39,-450.79 307.09,-450.79 358.27,-501.97 B4.1
EXPON: B5.44 R6.2 | length 961.4
  Top Layer w8: B5.44@187.93,-62.99 228.35,-62.99 241.14,-75.79 287.63,-75.79 303.38,-91.54 v1(308.34,-91.54) ; v2(788.39,364.17) 837.68,364.17 R6.2
  Bottom Layer w8: v1(308.34,-91.54) 308.34,-89.3 422.24,24.61 422.24,209.65 576.77,364.17 v2(788.39,364.17)
GND: B1.2 B2.2 B3.2 B4.2 B5.23 C1.1 C2.1 C3.1 C4.1 C5.1 C6.1 C7.1 C8.1 C11.2 C12.1 C13.1 C14.1 C15.1 C16.1 C17.1 C18.1 C27.1 C28.1 C29.1 C30.1 C31.1 C32.1 C33.1 C34.1 C35.1 C36.1 C37.1 C38.1 C39.1 C40.1 C41.1 C42.1 C43.1 C44.1 C45.1 C46.1 C47.1 C48.1 C49.1 C50.1 C51.1 D1.C D2.1 J1.2 J1.3 J1.MH J2.4 J2.7 J2.10 J2.11 J3.4 J3.7 J3.10 J3.11 J4.4 J4.7 J4.10 J4.11 J5.4 J5.7 J5.10 J5.11 J6.4 J6.7 J6.10 J6.11 R5.2 R9.1 X1.2 X1.4 | length 3615.2
  Top Layer w8: B5.23 -94.49,-117.37 ; v1(244.09,161.42) 262.4,179.72 C11.2
  Top Layer w8.17: 84.65,-536.42 85.14,-536.91 ; R5.2 R5.2@213.58,284.45 ; C38.1 264.57,-139.96 301.38,-139.96 v1(302.17,-140.75) ; C11.2 341.14,179.72 X1.4 ; v1(417.32,339.57) 417.32,275.59 X1.2 455.71,273.62 483.27,246.06 C18.1
  Top Layer w21: v2(803.15,435.04) C12.1 ; B3.2 v2(1062.65,558.07) ; B2.2 963.91,814.63 1070.21,814.63 v2(1072.83,812.01)
  Top Layer w23: C32.1 -208.27,-273.62 -207.96,-273.93 -207.96,-274.33 -207.57,-274.72 -207.57,-313.69 v1(-206.69,-314.57) ; C48.1 v1(-62.01,-304.13) ; v2(-19.68,-559.06) -19.19,-559.55 -19.19,-608.76 C5.1 ; v1(4.57,-449.8) 4.57,-448.57 8.19,-444.95 8.19,-413.73 C37.1@8.42,-413.73 ; v2(41.34,-727.36) 44.7,-727.36 52.86,-719.21 84.33,-719.21 84.65,-718.9 C3.1 ; C42.1@75.94,-226.54 v1@115,-226.54 ; v2(85.28,-499.02) 85.63,-499.36 B1.2 ; C29.1 87.52,-273.93 87.52,-296.91 101.38,-310.77 v1(101.38,-312.01) ; C40.1 v1(165.35,311.02) ; R5.2@213.58,285.12 213.89,285.43 213.99,285.34 264.23,285.34 v1(264.33,285.25) ; v1(239.17,-392.72) C47.1 ; B4.2 v2(320.87,-506.89) ; C44.1 347.93,-350.89 347.93,-395.18 v1(348.43,-395.67) ; C15.1 v2(440.94,-727.36) ; C16.1 415.85,-779.04 464.07,-779.04 v2(464.57,-778.54) ; C45.1 434.74,-291.04 434.74,-246.36 v1(435.04,-246.06)
  Top Layer w25: v1(-272.64,234.25) -272.15,234.74 -242.03,234.74 C51.1 ; R9.1 410.93,-440.46 410.93,-485.73 v1(411.42,-486.22) ; v2(695.87,720.47) C7.1 ; v2(747.05,417.32) 747.54,417.81 747.54,463.29 747.83,463.58 C13.1 ; v2(787.79,310.98) v2(787.79,310.98) 833.66,311.02 D2.1 ; C6.1 821.92,723.45 849.38,723.45 v2(851.38,721.46) ; C14.1 v2(955.71,665.35) ; C8.1 913.39,923.43 913.68,923.72 966.04,923.72 v2(966.54,924.21)
  Top Layer w30: v2(-17.72,-1053.15) -16.25,-1053.15 -15.03,-1051.93 45.51,-1051.93 C2.1 58.82,-1051.93 119.36,-1051.93 122.55,-1055.12 v2(124.02,-1055.12) ; v2(174.21,-1146.65) 240.16,-1146.65 C1.1 245.08,-1143.7 v2(315.94,-1143.7) ; C4.1 180.61,-771.16 218.01,-771.16 v2(218.5,-771.65) ; C17.1@220.47,-598.19 v2(220.47,-550.2) ; v2(471.04,-1133.76) 471.04,-1102.18 488.61,-1084.61 489.02,-1084.61 D1.C@515.75,-1057.87 ; v2(515.75,-1163.39) D1.C D1.C@515.75,-1057.87 ; v2(562.99,-1133.76) 562.99,-1102.18 545.42,-1084.61 542.48,-1084.61 D1.C@515.75,-1057.87
  Bottom Layer w25: v1(-270.67,76.6) -269.98,76.6 -245.94,52.56 C39.1 ; v1(-269.69,150.59) -269.2,151.08 -230.22,151.08 C31.1 ; v1(-114.17,421.26) -47.24,354.33 C34.1 ; C50.1 -90.06,13.28 -61.51,13.28 v1(-61.02,12.8) ; v1(-55.12,56.1) -55.12,56.79 -37.01,74.91 C30.1 ; C35.1 v1(-18.7,-77.76) ; C28.1 -36.96,-132.82 2.31,-132.82 v1(2.8,-132.33) ; v1(-28.54,25.59) -28.54,26.18 C49.1 ; C41.1 v1(5.91,-31.5) ; v1(3.74,435.23) 48.23,390.75 C27.1 ; v1(40.18,94.49) 40.18,93.8 53.74,80.24 C33.1 ; v1(62.01,-77.76) 62.5,-77.27 93.99,-77.27 C43.1 ; v1(214.26,335.32) 214.57,335.01 214.57,266.83 185.04,237.3 185.04,158.76 216.54,127.26 C46.1
  other v1: 115.16,-226.38 61.02,-19.68 5.91,6.89
NetC9_2: C9.2 J2.9 | length 114.2
  Top Layer w8.17: J2.9 C9.2
NetC10_2: C10.2 J2.8 | length 117.4
  Top Layer w8.17: J2.8 -614.17,31.5 -507.87,31.5 C10.2
NetC19_2: C19.2 J3.9 | length 115.4
  Top Layer w8.17: J3.9 -416.34,619.09 -416.34,509.25 C19.2
NetC20_2: C20.2 J3.8 | length 114.2
  Top Layer w8.17: J3.8 -496.56,620.57 -496.56,507.78 C20.2
NetC21_2: C21.2 J4.9 | length 115
  Top Layer w8.17: C21.2 430.14,508.84 430.14,621.08 J4.9
NetC22_2: C22.2 J4.8 | length 115.4
  Top Layer w8.17: J4.8 353.84,620.57 353.84,509.35 C22.2
NetC25_2: C25.2 J6.9 | length 120.3
  Top Layer w8.17: J6.9 -617.62,-650.1 -501.48,-650.1 C25.2
NetC26_2: C26.2 J6.8 | length 119.5
  Top Layer w8.17: J6.8 -618.6,-727.85 -500.49,-727.85 C26.2
NetD2_2: D2.2 R6.1 | length 53.9
  Top Layer w25: R6.1@895.41,364.43 895.41,312.34 D2.2
OC1: B1.3 B5.25 R1.1 | length 432.9
  Top Layer w8: B5.25 -62.99,-243.78 48.23,-355 48.23,-497.05 B1.3
OC2: B2.3 B5.18 R2.1 | length 4015.8
  Top Layer w8: B5.18 -193.9,-125.98 -205.71,-137.8 -205.71,-163.39 -247.05,-204.72 -247.05,-341.54 -217.52,-371.06 -145.67,-371.06 v1(-125,-350.39) ; B2.3 R2.1 1098.43,852.36 v2(1099.08,851.71)
  Bottom Layer w8: v1(-125,-350.39) -146.65,-372.05 -356.53,-372.05 -398.62,-414.14 -398.62,-522.64 -312.01,-609.25 435.04,-609.25 477.36,-566.93 477.36,-369.09 250,-141.73 250,-20.67 345.47,74.8 345.47,347.44 546.26,548.23 982.28,548.23 1126.97,692.91 1126.97,821.41 1099.08,849.3 v2(1099.08,851.71)
OC3: B3.3 B5.41 R3.1 | length 1838.1
  Top Layer w8: B5.41 B5.41 201.39,-110.3 221.25,-130.16 221.25,-165.82 254.25,-198.82 352.36,-198.82 v1(355.32,-195.87) ; B3.3 R3.1@1020.08,595.47 ; R3.1 1025.1,594.98 1152.07,594.98 v2(1152.56,595.47)
  Top Layer w25: R3.1@1021.06,594.49 R3.1
  Bottom Layer w8: v1(355.32,-195.87) 444.88,-195.87 553.15,-87.6 553.15,167.32 619.09,233.27 1021.59,233.27 1152.56,364.24 v2(1152.56,595.47)
OC4: B4.3 B5.27 R4.1 | length 551.3
  Top Layer w8: B5.27 -31.5,-232.28 200.79,-464.57 258.86,-464.57 270.67,-476.38 270.67,-495.57 R4.1 272.08,-503.38 272.08,-526.01 280.09,-534.02 280.09,-558.63 B4.3
RESET: B5.24 C37.2 R7.1 | length 274.4
  Top Layer w8: B5.24 -78.74,-251.35 -15.75,-314.34 -15.75,-375.61
  Top Layer w23: R7.1 -15.75,-375.61 C37.2@7.38,-375.61
REXT: B5.57 R5.1 | length 102.1
  Top Layer w8.17: B5.57 175.2,172.24 212.02,209.06 212.02,227.76 R5.1
RXI_N: C24.2 J5.6 | length 112.4
  Top Layer w8.17: C24.2 514.37,-48.62 619.49,-48.62 J5.6
RXI_P: C23.2 J5.5 | length 110.7
  Top Layer w8.17: C23.2 512.4,32.09 621.46,32.09 J5.5
SSRXI_N: B5.50 C24.1 | length 347.2
  Top Layer w8.17: B5.50 187.69,31.5 188.98,32.78 361.22,32.78 406.93,-12.93 458.86,-12.93 473.7,-27.77 C24.1@473.7,-50.87
SSRXI_P: B5.51 C23.1 | length 346.5
  Top Layer w8.17: B5.51 187.69,47.24 188.98,45.96 366.68,45.96 412.39,0.24 465.46,0.24 476.39,11.17 476.39,29.13 C23.1
SSRXO1_N: B5.5 J2.5 | length 596.9
  Top Layer w8.17: J2.5 -585.33,-175.88 -553.83,-175.88 -527.56,-149.61 -527.56,-128.87 -292.39,106.3 -235.51,106.3 -209.23,80.03 -188.98,80.03 -187.69,78.74 B5.5
SSRXO1_P: B5.4 J2.6 | length 596.9
  Top Layer w8.17: J2.6 -585.33,-162.7 -559.29,-162.7 -540.73,-144.15 -540.73,-123.41 -297.85,119.47 -230.05,119.47 -203.78,93.2 -188.98,93.2 -187.69,94.49 B5.4
SSRXO2_N: B5.72 J3.5 | length 955.2
  Top Layer w8.17: J3.5 -700.48,588.28 -700.48,468.81 -566.32,334.65 -161.42,334.65 -77.45,250.68 -77.45,188.98 -78.74,187.69 B5.72
SSRXO2_P: B5.71 J3.6 | length 955.2
  Top Layer w8.17: J3.6 -687.31,588.28 -687.31,474.26 -560.87,347.82 -155.96,347.82 -64.28,256.14 -64.28,191.59 -63.14,190.45 -63.14,175.35 B5.71
SSRXO3_N: B5.63 J4.5 | length 502.1
  Top Layer w8.17: B5.63 62.99,201.14 64.12,202.27 64.12,425.27 149.61,510.76 149.61,597.95 125.51,622.05 J4.5
SSRXO3_P: B5.62 J4.6 | length 501.9
  Top Layer w8.17: B5.62 78.74,202.78 77.29,204.23 77.29,419.81 162.78,505.3 162.78,599.79 185.04,622.05 J4.6
SSRXO4_N: B5.14 J6.5 | length 1331.1
  Top Layer w8.17: J6.5 -586.31,-930.8 -404.3,-930.8 -200.79,-727.29 -200.79,-531.5 -321.85,-410.43 -321.85,-143.63 -239.92,-61.7 -188.98,-61.7 -187.69,-62.99 B5.14
SSRXO4_P: B5.13 J6.6 | length 1331.1
  Top Layer w8.17: J6.6 -586.31,-917.63 -409.75,-917.63 -213.96,-721.83 -213.96,-536.95 -335.02,-415.89 -335.02,-138.17 -245.38,-48.53 -188.98,-48.53 -187.69,-47.24 B5.13
SSTXI_N: B5.47 J5.9 | length 559.7
  Top Layer w8.17: B5.47 200.79,-15.75 202.07,-14.46 321.55,-14.46 556.59,-249.5 591.62,-249.5 622.05,-279.92 J5.9
SSTXI_P: B5.48 J5.8 | length 559.7
  Top Layer w8.17: B5.48 200.79,0 202.07,-1.29 327,-1.29 562.04,-236.33 591.62,-236.33 622.05,-205.9 J5.8
SSTXO1_N: B5.2 C10.1 | length 405.1
  Top Layer w8.17: C10.1 -466.14,56.12 -460.63,61.63 -438.37,61.63 -401.57,98.43 -401.57,127.04 -344.94,183.68 -257.42,183.68 -201.26,127.52 -189.23,127.52 -187.69,125.98 B5.2
SSTXO1_P: B5.1 C9.1 | length 405.6
  Top Layer w8.17: C9.1 -464.58,104.73 -464.58,86.62 -452.76,74.8 -443.83,74.8 -414.75,103.88 -414.75,132.5 -350.39,196.85 -251.96,196.85 -195.8,140.69 -188.73,140.69 -187.69,141.73 B5.1
SSTXO2_N: B5.69 C20.1 | length 657.8
  Top Layer w8.17: C20.1 -495.49,468.91 -473.98,468.91 -461.8,456.74 -461.8,440.22 -421.85,400.26 -153.15,400.26 -30.21,277.32 -30.21,188.98 -31.5,187.69 B5.69
SSTXO2_P: B5.68 C19.1 | length 657.1
  Top Layer w8.17: C19.1@-414.86,469 -414.94,468.91 -436.38,468.91 -448.63,456.67 -448.63,445.68 -416.39,413.44 -147.69,413.44 -17.04,282.78 -17.04,188.98 -15.75,187.69 B5.68
SSTXO3_N: B5.60 C22.1 | length 518.9
  Top Layer w8.17: B5.60 110.24,201.46 111.52,202.74 111.52,315.19 201.84,405.51 350.85,405.51 385.66,440.32 385.66,456.86 374.99,467.53 357.87,467.53 C22.1
SSTXO3_P: B5.59 C21.1 | length 519.4
  Top Layer w8.17: B5.59@125.97,175.2 125.97,202.16 124.7,203.44 124.7,309.74 207.3,392.34 356.31,392.34 398.83,434.86 398.83,457.89 409.5,468.55 427.65,468.55 C21.1
SSTXO4_N: B5.11 C26.1 | length 896.9
  Top Layer w8.17: C26.1@-461.78,-727.93 -461.15,-727.29 -461.15,-708.67 -446.97,-694.49 -428.16,-694.49 -383.94,-650.27 -383.94,-134.85 -263.55,-14.46 -188.98,-14.46 -187.69,-15.75 B5.11 ; C26.1@-461.22,-737.2 C26.1@-460.24,-738.19
SSTXO4_P: B5.10 C25.1 | length 895.2
  Top Layer w8.17: C25.1 -462.2,-671.65 -452.54,-681.32 -433.62,-681.32 -397.11,-644.81 -397.11,-129.39 -269,-1.29 -188.98,-1.29 -187.69,0 B5.10
USB1: B1.5 C3.2 C4.2 J2.1 | length 1964.4
  Top Layer w23: C4.2@122.64,-765.35 C3.2@122.64,-726.38 ; C3.2@122.64,-716.54 122.64,-716.14 123.03,-715.75 B1.5
  Top Layer w30: v2(-32.48,-770.67) C4.2
  Layer 3 w30: J2.1 -825.79,86.61 -940.94,-28.54 -940.94,-353.35 -841.54,-452.76 -596.46,-452.76 -278.54,-770.67 v2(-32.48,-770.67)
USB2: B2.5 C6.2 C7.2 J3.1 | length 1803.3
  Top Layer w25: J3.1 -437.99,906.5 -238.19,1106.3 521.65,1106.3 750,877.95 C7.2 C6.2 B2.5
USB3: B3.5 C12.2 C13.2 J4.1 | length 905.2
  Top Layer w25: J4.1 411.42,807.09 492.13,887.8 582.68,887.8 638.78,831.69 638.78,570.87 688.98,520.67 C13.2 ; C13.2@755.91,520.67 B3.5
USB4: B4.5 C15.2 C16.2 J6.1 | length 1359.1
  Top Layer w23: B4.5 358.27,-726.38 358.86,-726.97 C15.2 C16.2@358.86,-772.24
  Top Layer w25: 318.9,-779.53 C16.2
  Top Layer w27: 288.39,-810.04 318.9,-779.53
  Top Layer w30: v2(-31.5,-820.87) 277.56,-820.87 288.39,-810.04
  Layer 3 w30: J6.1 -678.15,-607.28 -639.76,-568.9 -639.76,-567.77 -622.19,-550.2 -566.93,-550.2 -296.26,-820.87 v2(-31.5,-820.87)
"USB Bus": J5.1 R8.2 | length 299.1
  Top Layer w25: R8.2 561.18,-439.8 681.1,-319.88 J5.1
VBUSDET: B5.45 R8.1 R9.2 | length 622.5
  Top Layer w8: B5.45 233.27,-47.24 247.05,-61.02 317.91,-61.02 475.39,-218.5 475.39,-316.93 450.79,-341.54 450.79,-381.1 ; R9.2 R9.2@410.51,-382.8 ; R8.1@488.9,-382.8 R8.1
  Top Layer w23: R9.2@410.51,-382.8 449.01,-382.8 R8.1@488.9,-382.8
XTALI: B5.55 C18.2 X1.1 | length 415.9
  Top Layer w8.17: B5.55 204.72,110.24 233.04,138.55 259.88,138.55 264.31,142.98 465.81,142.98 477.76,154.93 477.76,168.71 C18.2 428.15,174.21 X1.1
XTALO: B5.56 C11.1 X1.3 | length 264
  Top Layer w8.17: X1.3 311.02,273.62 282.48,245.08 C11.1 261.81,217.52 216.54,172.24 216.54,149.61 201.02,134.09 201.02,134.03 193.12,126.13 B5.56@175.35,126.13 ; B5.56@175.35,126.13 B5.56 B5.56@175.35,126.13
pads on no net: B5.30 B5.31 B5.32 B5.33 B5.34 B5.35 B5.36 B5.37
copper on no net: | length 9763.8
  Top Layer w10: -1220.47,-1220.47 1220.47,-1220.47 1220.47,1220.47 -1220.47,1220.47 -1220.47,-1220.47

## Polygon pours and split planes (outlines as drawn)
GND on Top Layer "GND_L01_P000" (solid, pour order 0): -126.97,126.97 126.97,126.97 126.97,-126.97 -126.97,-126.97
+5 on Top Layer "+5_L01_P022" (solid, pour order 22): 774.61,939.96 781.5,946.85 871.06,946.85 871.06,893.7 885.83,878.94 885.83,838.58 836.61,838.58 834.65,840.55 834.65,901.57 777.56,897.64 769.69,916.34 769.69,934.06
+5 on Top Layer "+5_L01_P021" (solid, pour order 21): 773.62,683.07 780.51,689.96 870.08,689.96 870.08,636.81 884.84,622.05 884.84,581.69 835.63,581.69 833.66,583.66 833.66,644.68 776.57,640.75 768.7,659.45 768.7,677.17
+5 on Top Layer "+5_L01_P007" (solid, pour order 7): -2.95,-845.47 -18.7,-852.36 -34.45,-860.24 -39.37,-870.08 -42.32,-952.76 -20.67,-974.41 -18.7,-975.39 0.98,-975.39 4.92,-971.46 9.84,-966.54 84.65,-962.6 108.27,-986.22 160.43,-986.22 162.4,-984.25 162.4,-891.73 101.38,-845.47
"+1v1 Fil" on Top Layer "Top Layer-+1v1 Fil" (solid, pour order 20): 210.63,-301.18 227.95,-309.06 269.68,-309.06 275.59,-336.61 278.54,-345.47 284.94,-347.93 291.45,-350.44 306.21,-348.2 311.02,-338.58 312.99,-332.68 313.98,-329.72 313.98,-312.99 315.94,-308.07 404.53,-309.06 409.45,-304.13 409.45,-274.79 326.96,-274.79 158.46,-271.98 158.46,-293.31 161.42,-301.18 163.39,-301.18
"1v1 Out" on Top Layer "1V1_OUT_L01_P017" (solid, pour order 17): 158.46,-137.8 158.46,-210.63 158.46,-214.57 161.42,-240.16 198.82,-240.16 198.82,-199.8 196.85,-190.94 191.93,-137.8
+5 on Top Layer "+5_L01_P013" (solid, pour order 13): 296.26,-643.7 297.24,-644.69 297.24,-685.04 256.89,-685.04 242.13,-685.04 242.13,-720.47 240.16,-724.41 230.32,-734.25 210.63,-734.25 196.85,-720.47 196.85,-643.7
+5 on Top Layer "+5_L01_P012" (solid, pour order 12): -43.31,-727.36 -43.31,-721.46 -44.29,-649.61 28.54,-649.61 33.46,-646.65 33.46,-634.84 62.01,-634.84 67.42,-644.19 69.88,-646.65 69.88,-689.96 17.72,-689.96 7.87,-680.12 -2.95,-680.12 -2.95,-695.87 8.86,-707.68 0.98,-736.71 -39.86,-736.71 -43.31,-682.09
"+5 NF" on Top Layer "+5_NF_L01_P005" (solid, pour order 5): 423.23,-959.65 422.24,-960.63 312.99,-960.63 286.42,-987.2 282.48,-983.27 282.48,-896.65 235.24,-896.65 229.33,-902.56 229.33,-985.24 216.54,-985.24 198.82,-1002.95 198.82,-1053.15 312.01,-1053.15 326.77,-1038.39 424.21,-1038.39 424.21,-960.63
"+5 Bus" on Top Layer "+5_BUS_L01_P003" (solid, pour order 3): 565.94,-936.02 568.48,-938.55 573.82,-940.53 578.32,-940.53 638.78,-1000.98 639.76,-1000 696.85,-1000 696.85,-999.02 714.57,-981.3 714.57,-826.77 689.96,-802.17 625.98,-802.17 594.27,-830.71 321.85,-830.71 321.85,-910.43 437.01,-910.43 462.6,-936.02 474.41,-936.02
"+1v1 Fil" on Layer 3 "+1V1_FIL_L03_P025" (solid, pour order 25): 257.87,-270.51 257.87,-444.88 289.37,-476.38 291.34,-474.41 346.46,-474.41 334.65,-302.17 334.65,-271.65
+3v3 on Layer 3 "+3V3_L03_P024" (solid, pour order 24): -142.72,-244.09 -145.67,-241.14 -359.25,-241.14 -359.25,-436.02 -251.97,-543.31 -48.23,-543.31 -10.83,-505.91 -12.8,-503.94 -12.8,-414.37 -111.22,-315.94 -111.22,-272.64
+5 on Layer 3 "Layer 3-+5" (solid, pour order 15): -40.64,-896.32 -41.34,-943.9 -36.42,-965.55 310.04,-949.8 310.04,-626.97 6.89,-638.78 4.71,-651.29 -36.42,-701.77 -41.34,-714.57 -33.71,-733.27 8.12,-750.41
GND on Layer 2 "GND_L02_P027" (solid, pour order 27): -1217.52,1221.46 -1213.58,1221.46 1222.44,1221.46 1215.56,-1215.56 1212.55,-1215.56 -1215.56,-1215.56